# Altium PCB 2018_ACT_EXPANDER_4PUMPS.PCBDOC
Units mm, origin at the board's own origin, x right, y up, seen from the top; angles counter-clockwise.
Board outline 72 x 58 mm, 4 copper layers (1-TOP, 2-SIGNAL, 3-GND, 4-BOTTOM); 118 components, 80 nets, 382 pads, 73 vias.
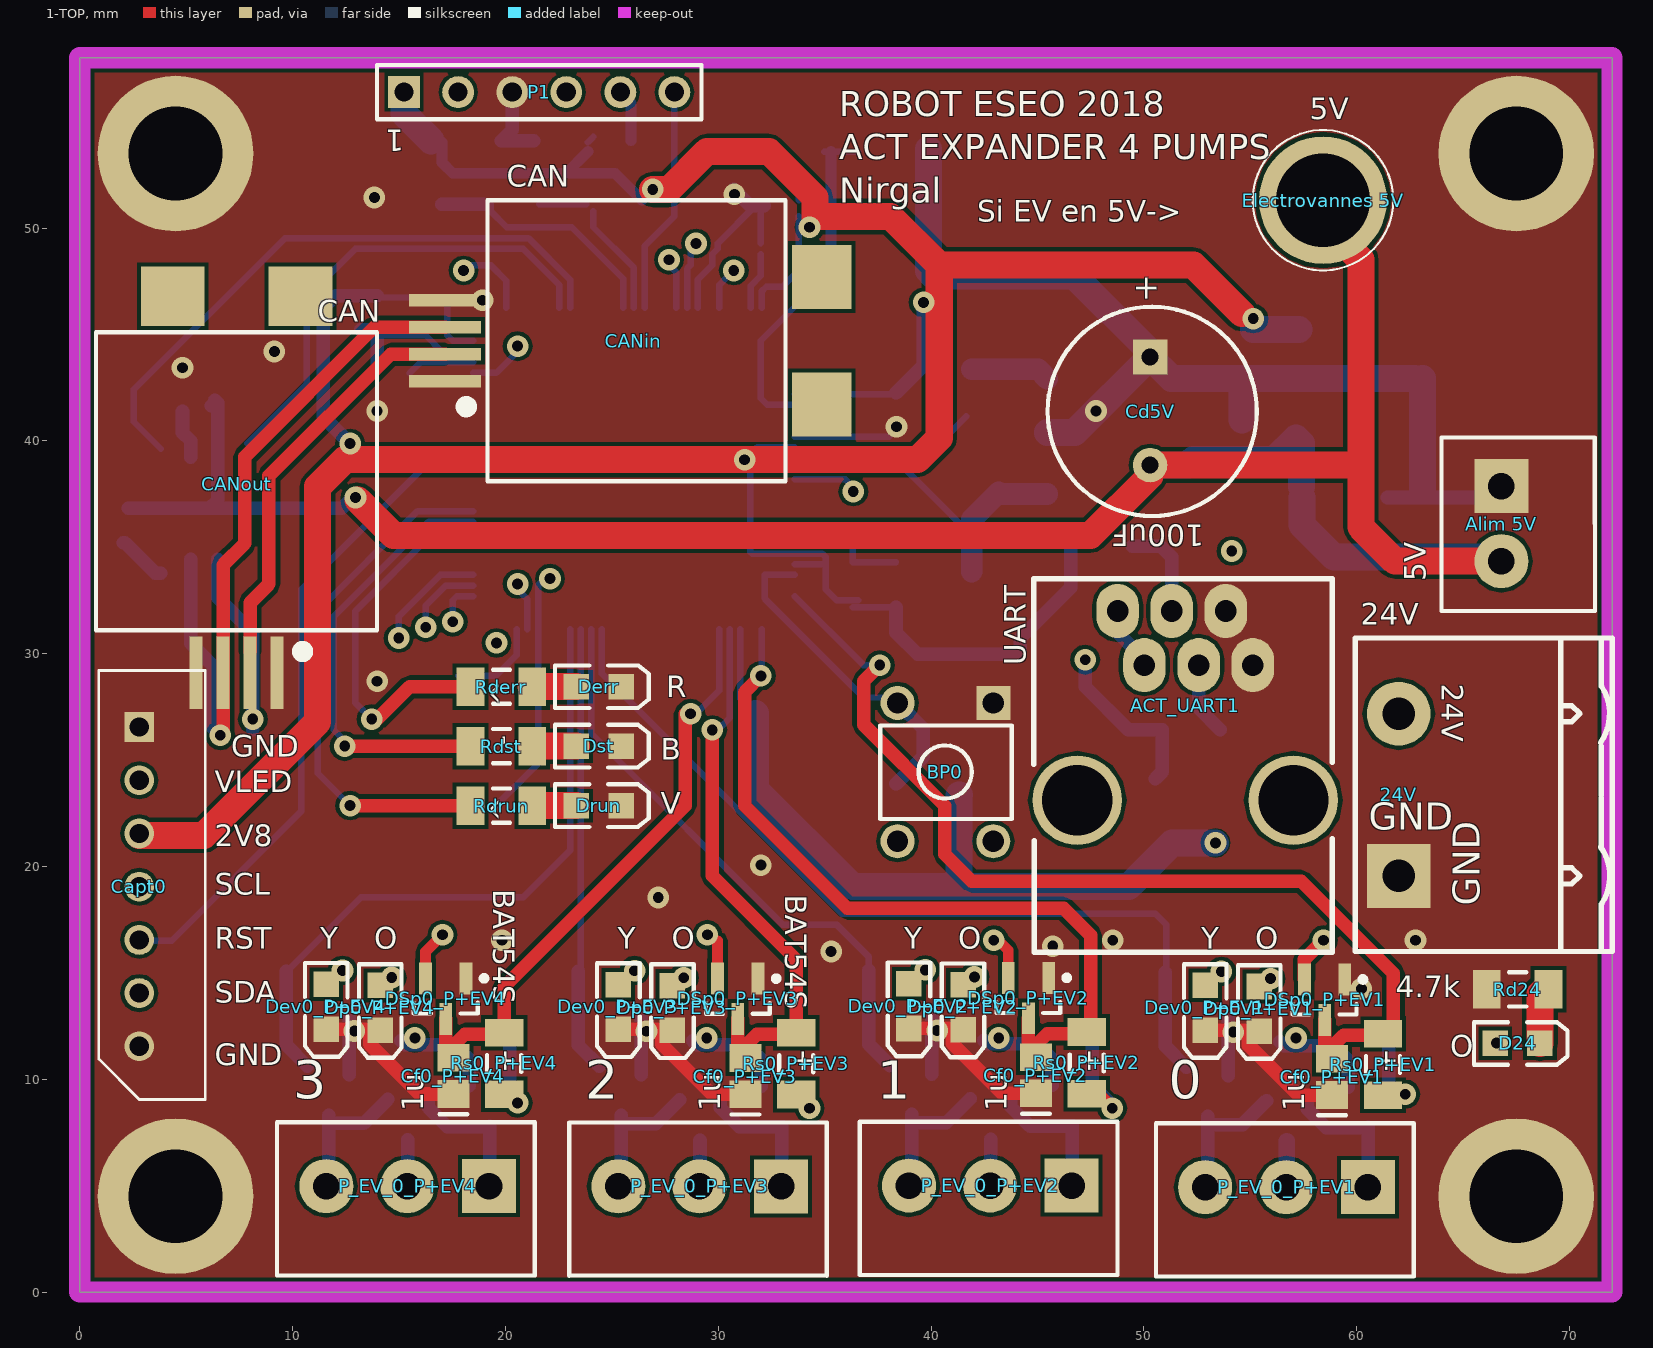
[diagram p0: 1-TOP view]
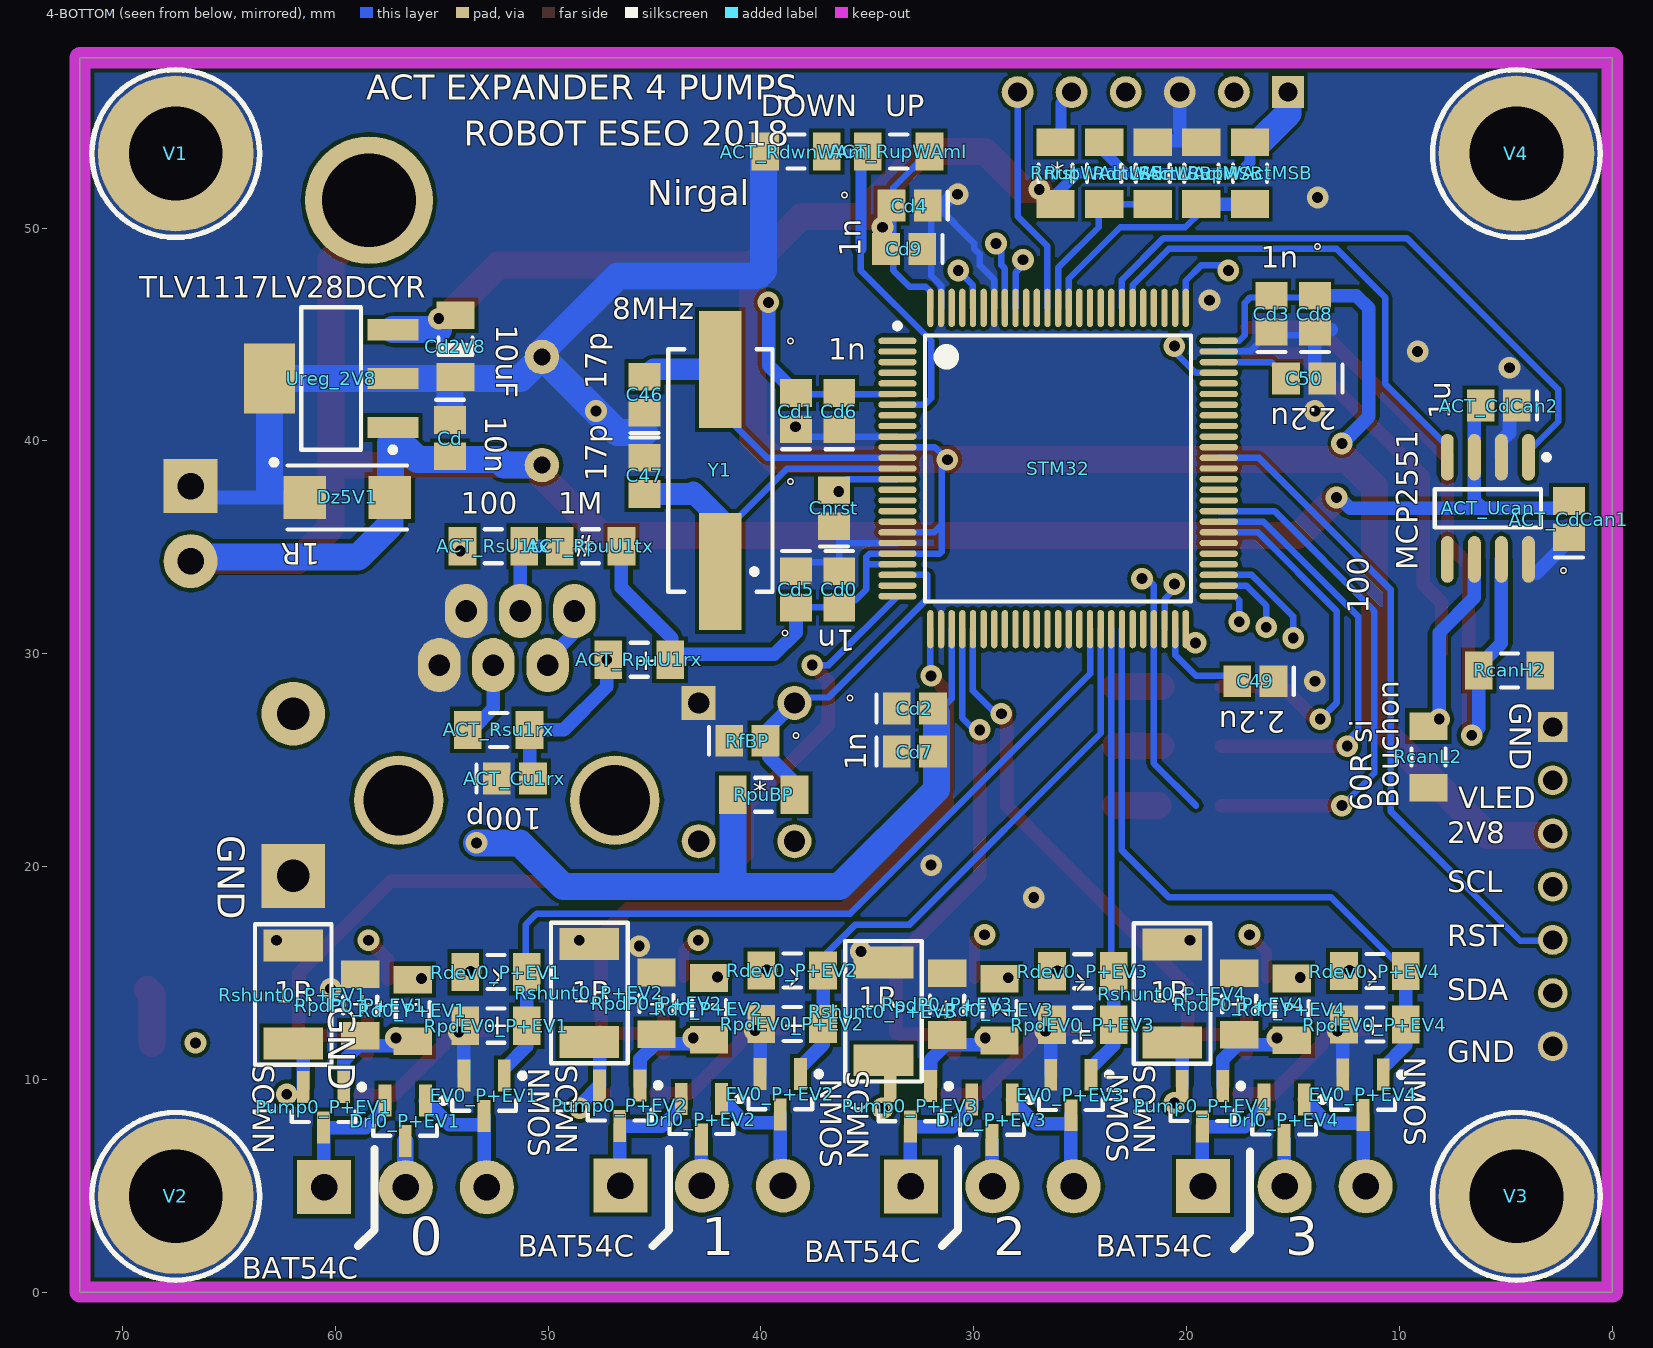
[diagram p1: 4-BOTTOM view, seen from below]
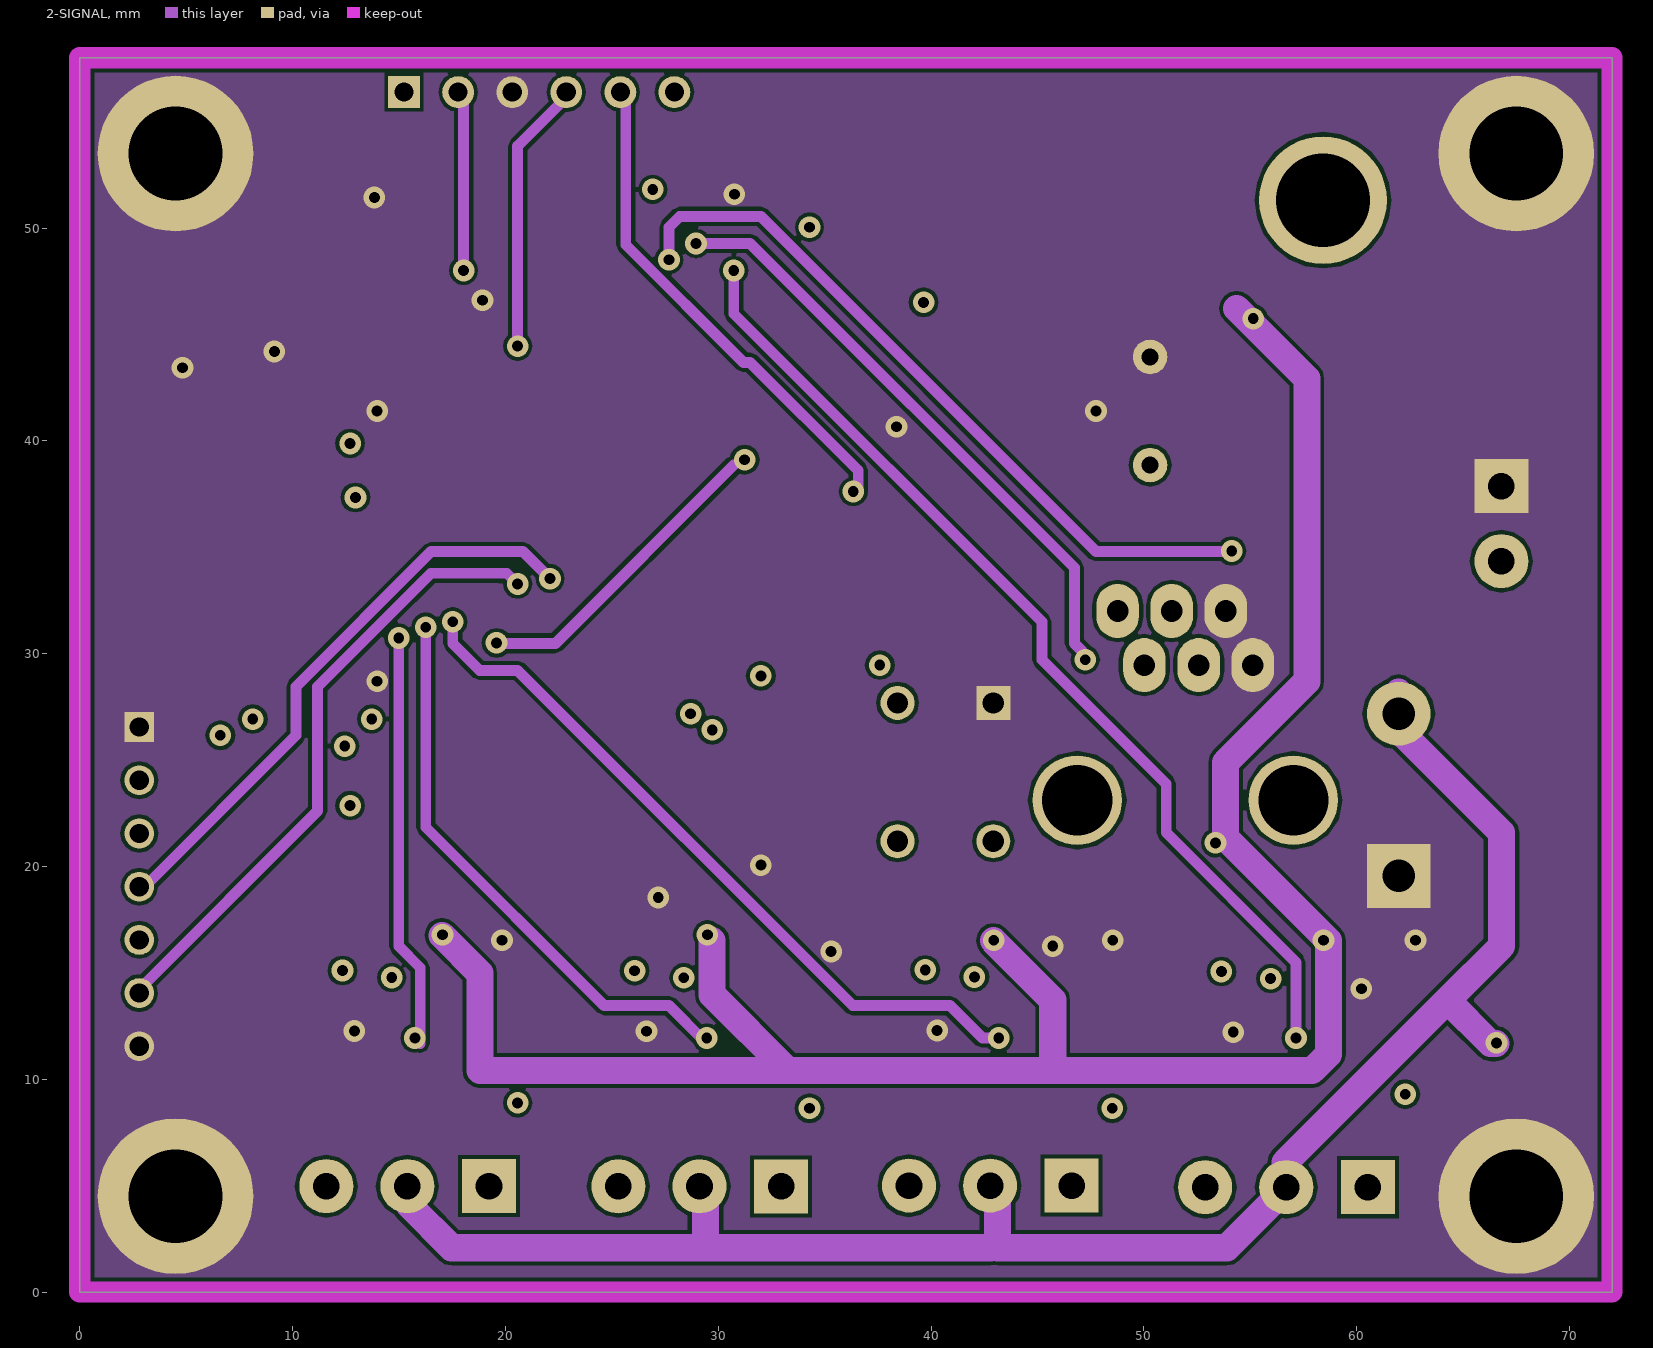
[diagram p2: 2-SIGNAL]
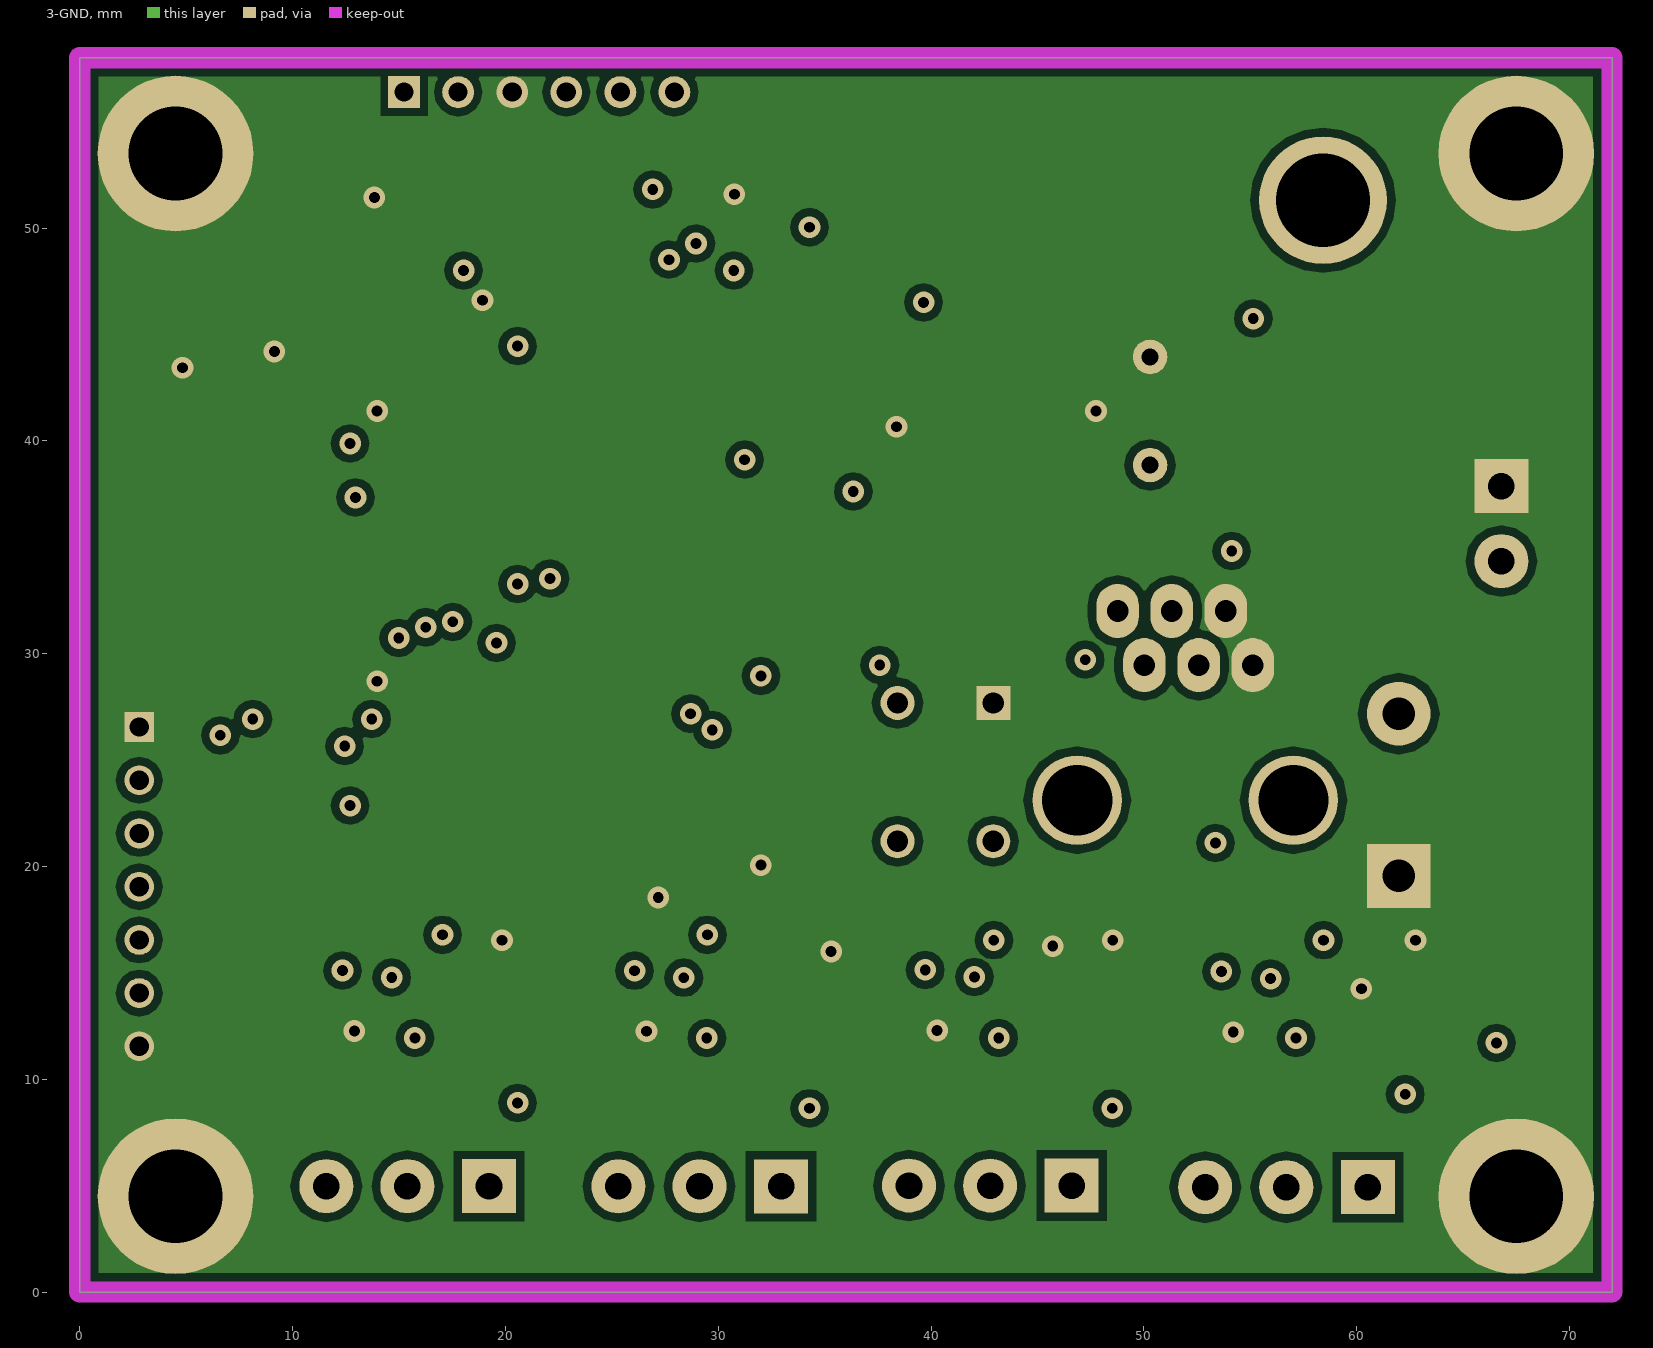
[diagram p3: 3-GND]
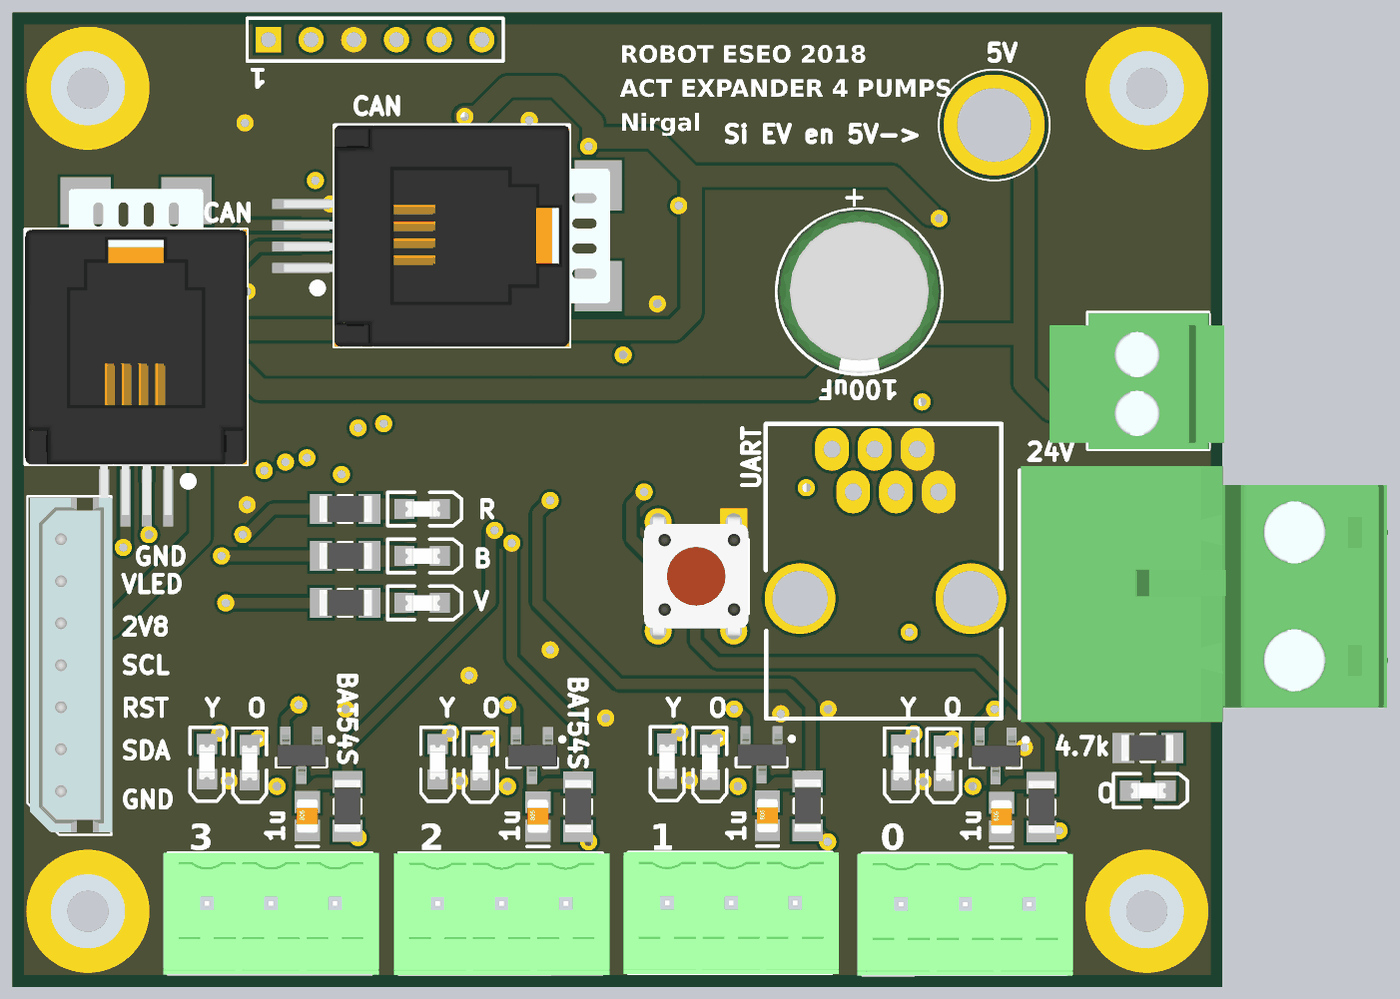
[diagram p4: 3D render of the assembled board from above, using the file's embedded part models]
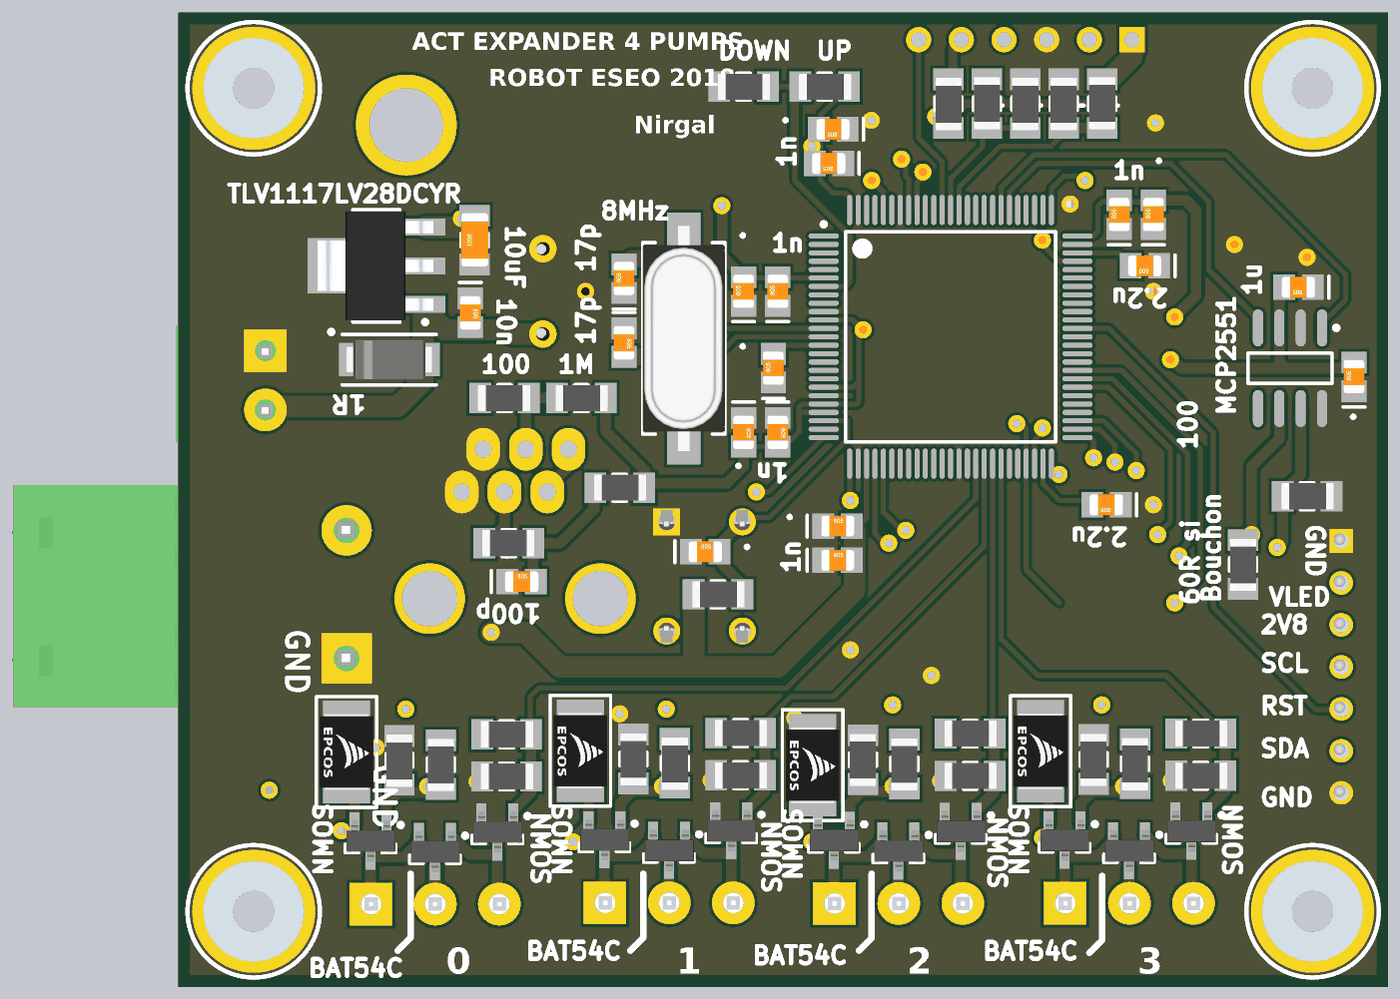
[diagram p5: 3D render of the assembled board from below, using the file's embedded part models]

## Layer stack, top to bottom
Top Solder: solder mask 0.0102, Solder Resist, Dk 3.5
1-TOP: signal copper 0.0356
Dielectric1: prepreg 0.32, FR-4, Dk 4.8
2-SIGNAL: signal copper 0.0356
Dielectric2: core 0.32, FR-4, Dk 4.8
3-GND: signal copper 0.0356
Dielectric3: prepreg 0.32, FR-4, Dk 4.8
4-BOTTOM: signal copper 0.0356
Bottom Solder: solder mask 0.0102, Solder Resist, Dk 3.5

## Board outline
0,0 0,58 72,58 72,0

## Design rules (kind name [scope] priority, off if disabled: settings)
Clearance Clearance_1 [InNamedPolygon('4-BOTTOM') Or  InNamedPolygon('2-SIGNAL') Or  InNamedPolygon('2-24V') Or  InNamedPolygon('3-TOP') Or  InNamedPolygon('3-GND')] p1: gap=0.381
Clearance [All] p2: gap=0.178
FabricationTestPointUsage TestPointUsage [All] p1: valid=0 allowmultiple=FALSE
FabricationTestpoint Testpoint [All] p1: side=3 testpointundercomponent=TRUE minsize=1.016 maxsize=2.54 preferedsize=1.524 minholesize=0 maxholesize=1.016 preferedholesize=0.813 testpointgrid=0.025 allowsidetop=TRUE allowsidebottom=TRUE usegrid=TRUE gridtolerance=0
PlaneClearance [All] p1: clearance=0.254
PlaneConnect [All] p1: planeconnectstyle=Direct reliefexpansion=0.635 reliefentries=4 reliefconductorwidth=0.305 reliefairgap=0.381
PolygonConnect [All] p1: connectstyle=Direct reliefconductorwidth=0.254 reliefentries=4 polygonreliefangle="90 Angle" airgapwidth=0.254
RoomDefinition P+EV1 [InComponentClass('P+EV1')] p1: confinementstyle=ConfineIn formatcopy=TRUE lockcomponents=FALSE outline 64.465,-0.584 64.465,18.567 49.428,18.567 49.428,-0.584
RoomDefinition P+EV2 [InComponentClass('P+EV2')] p2: confinementstyle=ConfineIn formatcopy=TRUE lockcomponents=FALSE outline 50.546,-0.508 50.546,18.644 35.509,18.644 35.509,-0.508
RoomDefinition P+EV4 [InComponentClass('P+EV4')] p3: confinementstyle=ConfineIn formatcopy=TRUE lockcomponents=FALSE outline 23.165,-0.536 23.165,18.616 8.128,18.616 8.128,-0.536
RoomDefinition 2018_ACT_EXPANDER [InComponentClass('2018_ACT_EXPANDER')] p4: confinementstyle=ConfineIn formatcopy=TRUE lockcomponents=FALSE outline 350.774,-27.432 387.604,-27.432 387.604,-40.894 350.774,-40.894
RoomDefinition P+EV3 [InComponentClass('P+EV3')] p5: confinementstyle=ConfineIn formatcopy=TRUE lockcomponents=FALSE outline 36.891,-0.544 36.891,18.608 21.854,18.608 21.854,-0.544
RoutingLayers RoutingLayers_1 [All] p1: top layer_v5=TRUE mid layer 1_v5=FALSE mid layer 2_v5=FALSE bottom layer_v5=TRUE
RoutingLayers [All] p2: top layer_v5=TRUE mid layer 1_v5=FALSE mid layer 2_v5=FALSE bottom layer_v5=TRUE
RoutingVias [All] p1: holewidth=0.711 width=1.27 viastyle="Through Hole" minholewidth=0.711 minwidth=1.27 maxholewidth=0.711 maxwidth=1.27
SilkToSolderMaskClearance SilkscreenOverComponentPads [IsPad] p1: minsilkscreentomaskgap=0.254 clearancetoexposedcopper=TRUE
SolderMaskExpansion [All] p1: expansion=0
Width [All] p1: maxlimit=7.62 minlimit=0.127 preferedwidth=0.508
23 further rules are at their usual default settings.

## Classes and differential pairs
component class 2018_ACT_EXPANDER: 24V ACT_CdCan1 ACT_CdCan2 ACT_Cu1rx ACT_RdwnWAmI ACT_RpuU1rx ACT_RpuU1tx ACT_Rsu1rx ACT_RsU1tx ACT_RupWAmI ACT_UART1 ACT_Ucan "Alim 5V" BP0 C46 C47 C49 C50 CANin CANout Capt0 Cd Cd0 Cd1 Cd2 Cd2V8 Cd3 Cd4 Cd5 Cd5V Cd6 Cd7 Cd8 Cd9 Cnrst D24 Derr Drun Dst Dz5V1 "Electrovannes 5V" P1 RcanH2 RcanL2 Rd24 Rderr RdnWActLSB RdnWActMSB Rdrun Rdst RfBP Rnrst RpuBP RupWActLSB RupWActMSB STM32 Ureg_2V8 V1 V2 V3 V4 Y1
channel class P+EV: P+EV1 P+EV2 P+EV3 P+EV4 P+EV5 P+EV6
component class P+EV4: Cf0_P+EV4 Dev0_P+EV4 Dp0_P+EV4 Drl0_P+EV4 DSp0_P+EV4 EV0_P+EV4 P_EV_0_P+EV4 Pump0_P+EV4 Rd0_P+EV4 Rdev0_P+EV4 RpdEV0_P+EV4 RpdP0_P+EV4 Rs0_P+EV4 Rshunt0_P+EV4
component class P+EV3: Cf0_P+EV3 Dev0_P+EV3 Dp0_P+EV3 Drl0_P+EV3 DSp0_P+EV3 EV0_P+EV3 P_EV_0_P+EV3 Pump0_P+EV3 Rd0_P+EV3 Rdev0_P+EV3 RpdEV0_P+EV3 RpdP0_P+EV3 Rs0_P+EV3 Rshunt0_P+EV3
component class P+EV2: Cf0_P+EV2 Dev0_P+EV2 Dp0_P+EV2 Drl0_P+EV2 DSp0_P+EV2 EV0_P+EV2 P_EV_0_P+EV2 Pump0_P+EV2 Rd0_P+EV2 Rdev0_P+EV2 RpdEV0_P+EV2 RpdP0_P+EV2 Rs0_P+EV2 Rshunt0_P+EV2
component class P+EV1: Cf0_P+EV1 Dev0_P+EV1 Dp0_P+EV1 Drl0_P+EV1 DSp0_P+EV1 EV0_P+EV1 P_EV_0_P+EV1 Pump0_P+EV1 Rd0_P+EV1 Rdev0_P+EV1 RpdEV0_P+EV1 RpdP0_P+EV1 Rs0_P+EV1 Rshunt0_P+EV1
net class EV[1..4]: EV1 EV2 EV3 EV4 EV5 EV6
net class PUMP[1..4]: PUMP1 PUMP2 PUMP3 PUMP4 PUMP5 PUMP6
net class SHUNT[1..4]: SHUNT1 SHUNT2 SHUNT3 SHUNT4 SHUNT5 SHUNT6

## Components (designator, comment, footprint, x,y, rotation, side; value= is the part's Value field where it differs from the comment)
24V "0 - 24V" BORNIER2_FEM_COUDE 61.976,19.558 r90 top
ACT_CdCan1 "100nF" C0805_N 2.032,36.322 r90 bottom
ACT_CdCan2 "1µF" C0805_N 5.334,41.656 r0 bottom
ACT_Cu1rx "100pF" C0805_N 51.562,24.13 r180 bottom
ACT_RdwnWAmI "0" R1206_N 38.354,53.594 r180 bottom
ACT_RpuU1rx "10k" R1206_N 45.72,29.718 r180 bottom
ACT_RpuU1tx "1M" R1206_N 48.006,35.052 r180 bottom
ACT_Rsu1rx "1k" R1206_N 52.324,26.416 r0 bottom
ACT_RsU1tx "100" R1206_N 52.578,35.052 r0 bottom
ACT_RupWAmI "0" R1206_N 33.528,53.594 r180 bottom
ACT_UART1 "RJ11_6/6" "RJ11_6/6 - droit" 53.848,32.004 r270 top
ACT_Ucan "MCP2551-I/SN" SO8_N 5.842,36.83 r270 bottom
"Alim 5V" "BORNIER_2V_3.5MM" BORNIER_2V_3.5MM 66.802,37.846 r270 top
BP0 "SW_Pushbutton_6x6mm_Vertical" "Switch 6x6 Vertical" 42.926,27.686 r270 top
C46 "17pF" C0805_N 45.466,42.164 r90 bottom
C47 "17pF" C0805_N 45.466,38.354 r270 bottom
C49 "2.2uF" C0805_N 16.764,28.702 r0 bottom
C50 "2.2uF" C0805_N 14.478,42.926 r0 bottom
CANin "634104149621" 634104149621 26.162,44.704 r90 top
CANout "634104149621" 634104149621 7.366,38.1 r180 top
Capt0 "BARRETTE7" MOLEX7_2.50MM 2.794,19.05 r90 top
Cd "10nF" C0805_N 54.61,40.132 r270 bottom
Cd0 "100nF" C0805_N 36.322,33.02 r270 bottom
Cd1 "100nF" C0805_N 38.354,41.402 r90 bottom
Cd2 "100nF" C0805_N 32.766,27.432 r180 bottom
Cd2V8 "4.7u" C1206_N 54.356,44.45 r90 bottom
Cd3 "100nF" C0805_N 16.002,45.974 r90 bottom
Cd4 "100nF" C0805_N 33.02,51.054 r0 bottom
Cd5 "1nF" C0805_N 38.354,33.02 r270 bottom
Cd5V "100uF" CONDENSATEUR_POLARISE_ELECTROLYTIQUE_RADIAL_5.08/8.9 50.292,43.942 r270 top
Cd6 "1nF" C0805_N 36.322,41.402 r90 bottom
Cd7 "1nF" C0805_N 32.766,25.4 r180 bottom
Cd8 "1nF" C0805_N 13.97,45.974 r90 bottom
Cd9 "1nF" C0805_N 33.274,49.022 r0 bottom
Cf0_P+EV1 "1uF" C0805_N 58.852,10.109 r90 top (schematic designator Cf0)
Cf0_P+EV2 "1uF" C0805_N 44.933,10.185 r90 top (schematic designator Cf0)
Cf0_P+EV3 "1uF" C0805_N 31.278,10.15 r90 top (schematic designator Cf0)
Cf0_P+EV4 "1uF" C0805_N 17.551,10.158 r90 top (schematic designator Cf0)
Cnrst "100nF" C0805_N 36.576,36.83 r90 bottom
D24 "LED Orange" LED_0805 67.564,11.684 r0 top
Derr "LED Rouge" LED_0805 24.384,28.448 r0 top
Dev0_P+EV1 "jaune" LED_0805 52.883,13.36 r270 top (schematic designator Dev0)
Dev0_P+EV2 "jaune" LED_0805 38.964,13.437 r270 top (schematic designator Dev0)
Dev0_P+EV3 "jaune" LED_0805 25.309,13.401 r270 top (schematic designator Dev0)
Dev0_P+EV4 "jaune" LED_0805 11.582,13.409 r270 top (schematic designator Dev0)
Dp0_P+EV1 "orange" LED_0805 55.423,13.31 r270 top (schematic designator Dp0)
Dp0_P+EV2 "orange" LED_0805 41.504,13.386 r270 top (schematic designator Dp0)
Dp0_P+EV3 "orange" LED_0805 27.849,13.35 r270 top (schematic designator Dp0)
Dp0_P+EV4 "orange" LED_0805 14.122,13.358 r270 top (schematic designator Dp0)
Drl0_P+EV1 "BAT54C" SOT23-3N 56.718,8.052 r270 bottom (schematic designator Drl0)
Drl0_P+EV2 "BAT54C" SOT23-3N 42.799,8.128 r270 bottom (schematic designator Drl0)
Drl0_P+EV3 "BAT54C" SOT23-3N 29.144,8.092 r270 bottom (schematic designator Drl0)
Drl0_P+EV4 "BAT54C" SOT23-3N 15.418,8.1 r270 bottom (schematic designator Drl0)
Drun "LED verte" LED_0805 24.384,22.86 r0 top
DSp0_P+EV1 "BAT54S" SOT23-3N 58.496,13.741 r270 top (schematic designator DSp0)
DSp0_P+EV2 "BAT54S" SOT23-3N 44.577,13.818 r270 top (schematic designator DSp0)
DSp0_P+EV3 "BAT54S" SOT23-3N 30.922,13.782 r270 top (schematic designator DSp0)
DSp0_P+EV4 "BAT54S" SOT23-3N 17.196,13.79 r270 top (schematic designator DSp0)
Dst "LED Bleu" LED_0805 24.384,25.654 r0 top
Dz5V1 "Diode Zener" "SMA Diode" 59.436,37.338 r180 bottom
"Electrovannes 5V" "Name" "Point Test_D0.9_P0.5mm" 58.42,51.308 r90 top
EV0_P+EV1 "MOSN" SOT23-3N 53.01,9.22 r270 bottom (schematic designator EV0)
EV0_P+EV2 "MOSN" SOT23-3N 39.091,9.296 r270 bottom (schematic designator EV0)
EV0_P+EV3 "MOSN" SOT23-3N 25.436,9.261 r270 bottom (schematic designator EV0)
EV0_P+EV4 "MOSN" SOT23-3N 11.709,9.269 r270 bottom (schematic designator EV0)
P1 "ProgSWD" HDR1X6 15.24,56.388 r0 top
P_EV_0_P+EV1 "BORNIER_3V_3.81MM" BORNIER_3V_3.81MM 60.503,4.928 r180 top (schematic designator P_EV_0)
P_EV_0_P+EV2 "BORNIER_3V_3.81MM" BORNIER_3V_3.81MM 46.584,5.004 r180 top (schematic designator P_EV_0)
P_EV_0_P+EV3 "BORNIER_3V_3.81MM" BORNIER_3V_3.81MM 32.929,4.968 r180 top (schematic designator P_EV_0)
P_EV_0_P+EV4 "BORNIER_3V_3.81MM" BORNIER_3V_3.81MM 19.202,4.976 r180 top (schematic designator P_EV_0)
Pump0_P+EV1 "MOSN" SOT23-3N 60.554,8.687 r270 bottom (schematic designator Pump0)
Pump0_P+EV2 "MOSN" SOT23-3N 46.634,8.763 r270 bottom (schematic designator Pump0)
Pump0_P+EV3 "MOSN" SOT23-3N 32.979,8.727 r270 bottom (schematic designator Pump0)
Pump0_P+EV4 "MOSN" SOT23-3N 19.253,8.735 r270 bottom (schematic designator Pump0)
RcanH2 "60" R1206_N 4.826,29.21 r180 bottom
RcanL2 "60" R1206_N 8.636,25.146 r270 bottom
Rd0_P+EV1 "150" R1206_N 56.363,13.233 r270 bottom (schematic designator Rd0)
Rd0_P+EV2 "150" R1206_N 42.443,13.31 r270 bottom (schematic designator Rd0)
Rd0_P+EV3 "150" R1206_N 28.788,13.274 r270 bottom (schematic designator Rd0)
Rd0_P+EV4 "150" R1206_N 15.062,13.282 r270 bottom (schematic designator Rd0)
Rd24 "4.7k" R1206_N 67.564,14.224 r180 top
Rderr "150" R1206_N 19.812,28.448 r0 top
Rdev0_P+EV1 "150" R1206_N 52.451,15.037 r180 bottom (schematic designator Rdev0)
Rdev0_P+EV2 "150" R1206_N 38.532,15.113 r180 bottom (schematic designator Rdev0)
Rdev0_P+EV3 "150" R1206_N 24.877,15.077 r180 bottom (schematic designator Rdev0)
Rdev0_P+EV4 "150" R1206_N 11.151,15.085 r180 bottom (schematic designator Rdev0)
RdnWActLSB "100" R1206_N 21.59,52.578 r270 bottom
RdnWActMSB "100" R1206_N 19.304,52.578 r270 bottom
Rdrun "150" R1206_N 19.812,22.86 r0 top
Rdst "100" R1206_N 19.812,25.654 r0 top
RfBP "100nF" C0805_N 40.64,25.908 r180 bottom
Rnrst "100k" R1206_N 26.162,52.578 r270 bottom
RpdEV0_P+EV1 "10K" R1206_N 52.451,12.522 r180 bottom (schematic designator RpdEV0)
RpdEV0_P+EV2 "10K" R1206_N 38.532,12.598 r180 bottom (schematic designator RpdEV0)
RpdEV0_P+EV3 "10K" R1206_N 24.877,12.563 r180 bottom (schematic designator RpdEV0)
RpdEV0_P+EV4 "10K" R1206_N 11.151,12.571 r180 bottom (schematic designator RpdEV0)
RpdP0_P+EV1 "10K" R1206_N 58.826,13.487 r270 bottom (schematic designator RpdP0)
RpdP0_P+EV2 "10K" R1206_N 44.907,13.564 r270 bottom (schematic designator RpdP0)
RpdP0_P+EV3 "10K" R1206_N 31.252,13.528 r270 bottom (schematic designator RpdP0)
RpdP0_P+EV4 "10K" R1206_N 17.526,13.536 r270 bottom (schematic designator RpdP0)
RpuBP "100k" R1206_N 39.878,23.368 r180 bottom
Rs0_P+EV1 "10K" R1206_N 61.239,10.693 r90 top (schematic designator Rs0)
Rs0_P+EV2 "10K" R1206_N 47.32,10.77 r90 top (schematic designator Rs0)
Rs0_P+EV3 "10K" R1206_N 33.665,10.734 r90 top (schematic designator Rs0)
Rs0_P+EV4 "10K" R1206_N 19.939,10.742 r90 top (schematic designator Rs0)
Rshunt0_P+EV1 "1 / 1w" INDUCTANCE_CMS_1812 62.281,16.281 r270 bottom (schematic designator Rshunt0)
Rshunt0_P+EV2 "1 / 1w" INDUCTANCE_CMS_1812 48.362,16.358 r270 bottom (schematic designator Rshunt0)
Rshunt0_P+EV3 "1 / 1w" INDUCTANCE_CMS_1812 34.544,15.494 r270 bottom (schematic designator Rshunt0)
Rshunt0_P+EV4 "1 / 1w" INDUCTANCE_CMS_1812 20.98,16.33 r270 bottom (schematic designator Rshunt0)
RupWActLSB "100" R1206_N 23.876,52.578 r90 bottom
RupWActMSB "100" R1206_N 17.018,52.578 r90 bottom
STM32 "STM32F407VGT6" STM-LQFP100_N 26.037,38.699 r180 bottom locked
Ureg_2V8 "TLV1117LV28DCYR" SOT223-4N 60.198,42.926 r0 bottom
V1 "Entretoise WURTH CMS" ENTRETOISE_CMS 67.5,53.5 r180 bottom
V2 "Entretoise WURTH CMS" ENTRETOISE_CMS 67.5,4.5 r180 bottom
V3 "Entretoise WURTH CMS" ENTRETOISE_CMS 4.5,4.5 r180 bottom
V4 "Entretoise WURTH CMS" ENTRETOISE_CMS 4.5,53.5 r180 bottom
Y1 "8 MHz" HC49/4H_SMX 41.91,38.608 r90 bottom

## Footprints (in the part's own frame and the unit in brackets; to place one, negate y for a bottom-side part, rotate by r counter-clockwise, add the part's x,y. Pads: shape width x height; smd on the part's side, far side on the other; paste and mask are expansions set on the pad)
634104149621 [mm] "Modular Jack SMT Vertical Plastic 4P4C Top Entry"
  rect 0.6x3.4 smd: 1(-1.905,9) 2(-0.635,9) 3(0.635,9) 4(1.905,9)
  rect 3x2.8 smd: MH1(-3,-8.7) MH2(3,-8.7)
  silkscreen extent -6.6,-7 6.6,8.25, body extent -6.6,-9.4 6.6,10, height 13
BORNIER2_FEM_COUDE [mm] "Connector; Header; 2 Position; Right Angle; Female; Pin Spacing=5.08mm Green"
  rect 3x3 hole 1.524: 1(0,0)
  round 3 hole 1.524: 2(7.62,0)
  silkscreen extent -3.56,-10.03 11.18,2.03, body extent -3.78,-19.88 11.46,1.96, height 15.2
BORNIER_2V_3.5MM [mm]
  rect 2.54x2.54 hole 1.25: 1(-0.025,0)
  round 2.54 hole 1.25: 2(3.5,0)
  silkscreen extent -2.31,-2.82 5.84,4.39, body extent -2.27,-5.08 5.83,5.32, height 21.81
BORNIER_3V_3.81MM [mm]
  rect 2.54x2.54 hole 1.25: 1(-0.025,0)
  round 2.54 hole 1.25: 2(3.81,0) 3(7.62,0)
  silkscreen extent -2.18,-3 9.93,4.2, body extent -2.6,-3 10.22,4.25, height 9.22
C0805_N [mm] "Chip Capacitor, Body 2.0x1.3mm, IPC Medium Density"
  rect 1.3x1.5 smd: 1(-0.85,0) 2(0.85,0)
  silkscreen extent -1.8,-0.65 -1.8,0.65, body extent -0.99,-0.63 1.01,0.63, height 0.8
C1206_N [mm] "Chip Capacitor, Body 3.2x1.6mm, IPC Medium Density"
  rect 1.3x1.8 smd: 1(-1.45,0) 2(1.45,0)
  silkscreen extent -0.4,-0.8 0.4,0.8, body extent -1.57,-0.81 1.63,0.79, height 1.02
CONDENSATEUR_POLARISE_ELECTROLYTIQUE_RADIAL_5.08/8.9 [mil] "CONDENSATEUR_POLARISE_ELECTROLYTIQUE_RADIAL ; DIAMETRE : 8.9mm ; ESPACEMENT BROCHES : 5.08mm"
  rect 64x64 / inner round 64 / far side round 64 hole 32: 1(0,0)
  round 64 hole 32: 2(200,0)
  silkscreen extent -93,-190 294,197, body extent -93,-188 291,196, height 485
ENTRETOISE_CMS [mil] "Entretoise CMS Wurth trou 4.4mm"
  round 288 hole 173.23: 1(0,0)
  silkscreen extent -155,-155 155,155, body extent -118,-118 118,117, height 118
HC49/4H_SMX [mm] "Quartz Crystal, SM; Body 13.4 (inc. leads) x 4.9 mm (LxW max)"
  rect 5.5x2 smd: 1(-4.75,0) 2(4.75,0)
  silkscreen extent -5.7,-2.45 5.7,2.45, body extent -6.7,-2.45 6.7,2.45, height 5.08
HDR1X6 [mm] "Connector; Header; 6 Position"
  rect 1.5x1.5 hole 0.9: 1(0,0)
  round 1.5 hole 0.9: 2(2.54,0) 3(5.08,0) 4(7.62,0) 5(10.16,0) 6(12.7,0)
  silkscreen extent -1.27,-1.27 13.97,1.27
INDUCTANCE_CMS_1812 [mm] "INDUCTANCE CMS 1812 ; DIMENSIONS : 4.5mm x 3.2mm"
  rect 1.5x2.8 smd: 1(0,0.3) 2(4.6,0.3)
  silkscreen extent -1,-1.5 5.6,2.1, body extent 0.05,-1.3 4.55,1.9, height 3.24
LED_0805 [mm] "SM LED; 2 Flat Leads"
  rect 1.2x1.2 smd: 1(-1.05,0) 2(1.05,0)
  silkscreen extent -2.05,-1 2.35,1, body extent -1.05,-0.64 1.06,0.64, height 1.2
MOLEX7_2.50MM [mm] "7 pins, straight"
  rect 1.4x1.4 hole 0.9: 1(7.5,0)
  round 1.4 hole 0.9: 2(5,0) 3(2.5,0) 4(0,0) 5(-2.5,0) 6(-5,0) 7(-7.5,0)
  silkscreen extent -10,-3.1 10.16,1.9, body extent -9.85,-3.15 10.05,1.75, height 5.95
"Point Test_D0.9_P0.5mm" [mm] "Test point for PCB_Hole 0.5mm"
  round 6 hole 4.4: 1(0,0)
  silkscreen extent -3.3,-3.3 3.3,3.3
R1206_N [mm] "Chip Resistor, Body 3.2x1.6mm, IPC Medium Density"
  rect 1.3x1.8 smd: 1(-1.45,0) 2(1.45,0)
  silkscreen extent -0.4,-0.8 0.4,0.8, body extent -1.68,-0.87 1.68,0.87, height 0.71
"RJ11_6/6 - droit" [mm] "Connector; RJ11; 6P/6C; Low Profil; Right Angle; Pin Spacing=2.54mm"
  oval 2.54x2 hole 1.016: 1(0,-5.08) 2(2.54,-3.82) 3(0,-2.54) 4(2.54,-1.27) 5(0,0) 6(2.54,1.27)
  round 4.2 hole 3.302: FIX1(8.89,3.18) FIX2(8.89,-6.98)
  silkscreen extent -1.51,-9.02 16.03,5, body extent -1.17,-9.66 15.31,6, height 16.45
"SMA Diode" [mm] "Case 403D-02"
  rect 2x2 smd: 1(-2,0) 2(2,0)
  silkscreen extent -3.58,-1.5 2.8,1.77, body extent -2.8,-1.46 2.79,1.46, height 2.41
SO8_N [mm] "SOIC, 8-Leads, Body 4.9x3.9mm, Pitch 1.27mm, IPC Medium Density"
  oval 2.2x0.6 smd: 1(-2.4,1.905) 2(-2.4,0.635) 3(-2.4,-0.635) 4(-2.4,-1.905) 5(2.4,-1.905) 6(2.4,-0.635) 7(2.4,0.635) 8(2.4,1.905)
  silkscreen extent -2.52,-2.5 0.9,2.88, body extent -2,-2.5 2,2.5, height 1.75
SOT23-3N [mm] "SOT23, 3-Leads, Body 2.9x1.3mm, Pitch 0.95mm, Lead Span 2.5mm, IPC Medium Density"
  rect 1.5x0.6 smd: 1(-0.95,0.95) 2(-0.95,-0.95) 3(0.95,0)
  silkscreen extent -1.07,-1.5 0.7,1.92, body extent -1.24,-1.5 1.23,1.5, height 1.1
SOT223-4N [mm] "SOT223/SC73, 4-Leads, Body 6.5x3.5mm, Pitch 2.3mm, Lead Span 7mm, IPC Medium Density"
  rect 2.4x1 smd: 1(-2.9,2.3) 2(-2.9,0) 3(-2.9,-2.3)
  rect 2.4x3.3 smd: 4(2.9,0)
  silkscreen extent -3.02,-3.35 1.4,3.47, body extent -3.39,-3.35 3.5,3.35, height 1.8
STM-LQFP100_N [mm] "Thin QFP, 100-Leads, Body 14x14mm, Pitch 0.5mm, IPC Medium Density"
  oval 1.8x0.3 smd: 1(-7.55,6) 2(-7.55,5.5) 3(-7.55,5) 4(-7.55,4.5) 5(-7.55,4) 6(-7.55,3.5) 7(-7.55,3) 8(-7.55,2.5) 9(-7.55,2) 10(-7.55,1.5) 11(-7.55,1) 12(-7.55,0.5) 13(-7.55,0) 14(-7.55,-0.5) 15(-7.55,-1) 16(-7.55,-1.5) 17(-7.55,-2) 18(-7.55,-2.5) 19(-7.55,-3) 20(-7.55,-3.5) 21(-7.55,-4) 22(-7.55,-4.5) 23(-7.55,-5) 24(-7.55,-5.5) 25(-7.55,-6) 51(7.55,-6) 52(7.55,-5.5) 53(7.55,-5) 54(7.55,-4.5) 55(7.55,-4) 56(7.55,-3.5) 57(7.55,-3) 58(7.55,-2.5) 59(7.55,-2) 60(7.55,-1.5) 61(7.55,-1) 62(7.55,-0.5) 63(7.55,0) 64(7.55,0.5) 65(7.55,1) 66(7.55,1.5) 67(7.55,2) 68(7.55,2.5) 69(7.55,3) 70(7.55,3.5) 71(7.55,4) 72(7.55,4.5) 73(7.55,5) 74(7.55,5.5) 75(7.55,6)
  oval 0.3x1.8 smd: 26(-6,-7.55) 27(-5.5,-7.55) 28(-5,-7.55) 29(-4.5,-7.55) 30(-4,-7.55) 31(-3.5,-7.55) 32(-3,-7.55) 33(-2.5,-7.55) 34(-2,-7.55) 35(-1.5,-7.55) 36(-1,-7.55) 37(-0.5,-7.55) 38(0,-7.55) 39(0.5,-7.55) 40(1,-7.55) 41(1.5,-7.55) 42(2,-7.55) 43(2.5,-7.55) 44(3,-7.55) 45(3.5,-7.55) 46(4,-7.55) 47(4.5,-7.55) 48(5,-7.55) 49(5.5,-7.55) 50(6,-7.55) 76(6,7.55) 77(5.5,7.55) 78(5,7.55) 79(4.5,7.55) 80(4,7.55) 81(3.5,7.55) 82(3,7.55) 83(2.5,7.55) 84(2,7.55) 85(1.5,7.55) 86(1,7.55) 87(0.5,7.55) 88(0,7.55) 89(-0.5,7.55) 90(-1,7.55) 91(-1.5,7.55) 92(-2,7.55) 93(-2.5,7.55) 94(-3,7.55) 95(-3.5,7.55) 96(-4,7.55) 97(-4.5,7.55) 98(-5,7.55) 99(-5.5,7.55) 100(-6,7.55)
  silkscreen extent -7.68,-6.25 6.25,6.82, body extent -7,-7 7,7, height 1.6
"Switch 6x6 Vertical" [mm]
  rect 1.6x1.6 hole 1: 1(0,0)
  round 1.6 hole 1: 2(6.5,0) 3(0,-4.5) 4(6.5,-4.5)
  silkscreen extent 1.07,-5.31 5.46,0.86, body extent -0.71,-5.34 7.19,0.86, height 7

## Part data
24V: library part BORNIER2, "Terminal blocks, 2 pins, pitch=5mm"
ACT_CdCan1 ACT_CdCan2 ACT_Cu1rx C46 C47 C49 C50 Cd Cd0 Cd1 Cd2 Cd3 Cd4 Cd5 Cd6 Cd7 Cd8 Cd9 Cf0_P+EV1 Cf0_P+EV2 Cf0_P+EV3 Cf0_P+EV4 Cnrst RfBP: library part Condensateur, "Capacitor"
ACT_RdwnWAmI ACT_RpuU1rx ACT_RpuU1tx ACT_Rsu1rx ACT_RsU1tx ACT_RupWAmI RcanH2 RcanL2 Rd0_P+EV1 Rd0_P+EV2 Rd0_P+EV3 Rd0_P+EV4 Rd24 Rderr Rdev0_P+EV1 Rdev0_P+EV2 Rdev0_P+EV3 Rdev0_P+EV4 RdnWActLSB RdnWActMSB Rdrun Rdst Rnrst RpdEV0_P+EV1 RpdEV0_P+EV2 RpdEV0_P+EV3 RpdEV0_P+EV4 RpdP0_P+EV1 RpdP0_P+EV2 RpdP0_P+EV3 RpdP0_P+EV4 RpuBP Rs0_P+EV1 Rs0_P+EV2 Rs0_P+EV3 Rs0_P+EV4 Rshunt0_P+EV1 Rshunt0_P+EV2 Rshunt0_P+EV3 Rshunt0_P+EV4 RupWActLSB RupWActMSB: library part Resistor, "Resistor"
ACT_UART1: "Right Angle, Standard Profile, Offset Latch DECconnect, Flangeless PCB Jack"
ACT_Ucan: "High-Speed CAN Transceiver, 8-Pin SOIC, Industrial Temperature"
BP0: "Switch tactil 6mm x 6mm Vertical"
CANin CANout: "Modular Jack SMT Vertical Plastic 4P4C Top Entry WR-MJ"
Capt0: "Header, 6-Pin"
Cd2V8: library part Capacitor, "Capacitor"
Cd5V: library part "Condensateur Polarise Traversant", "Polarized Capacitor"
D24 Derr Dev0_P+EV1 Dev0_P+EV2 Dev0_P+EV3 Dev0_P+EV4 Dp0_P+EV1 Dp0_P+EV2 Dp0_P+EV3 Dp0_P+EV4 Drun Dst: library part LED, "Typical LED"
Drl0_P+EV1 Drl0_P+EV2 Drl0_P+EV3 Drl0_P+EV4: library part "Diode Shottky double BAT54C", "DIODE SCHOTTKY DOUBLE"
DSp0_P+EV1 DSp0_P+EV2 DSp0_P+EV3 DSp0_P+EV4: library part "Diode Shottky double BAT54S", "DIODE SCHOTTKY DOUBLE"
Dz5V1: "Zener Diode"
"Electrovannes 5V": library part "Point Test", "Point test"
EV0_P+EV1 EV0_P+EV2 EV0_P+EV3 EV0_P+EV4 Pump0_P+EV1 Pump0_P+EV2 Pump0_P+EV3 Pump0_P+EV4: library part "Transistor MOSFET-N", "N-Channel MOSFET"
P1: library part "Header 6", "Header, 6-Pin"
STM32: "ARM Cortex-M4 32-bit MCU+FPU, 210 DMIPS, 1024 kB Flash, 192 kB Internal RAM, 82 I/Os, 100-pin LQFP, -40 to 85 degC, Tray"
Ureg_2V8: library part MCP1826S-3302E/DB, "1000 mA, Low Voltage, Low Quiescent Current LDO Regulator, 3-Pin SOT-223, Extended Temperature"
V1 V2 V3 V4: "Entretoise Wurth"
Y1: library part Quartz, "Crystal Oscillator"

## Via types
v1: diameter 1.016, hole 0.508, 1-TOP to 4-BOTTOM, 73 vias

## Nets (pads, with @x,y where several pads share a name; then routed paths per layer and width w, separated by ;. In a path a pad name is that pad's centre, name@x,y a point inside that pad or via, vN(x,y) a via of type N, cw(c..) or ccw(c..) an arc to the next point about the centre after c; other vN are vias at no path point)
2V8: ACT_RpuU1rx.2 ACT_RpuU1tx.2 ACT_RupWAmI.2 Capt0.3 Cd0.2 Cd1.2 Cd2.2 Cd2V8.2 Cd3.2 Cd4.2 Cd5.2 Cd6.2 Cd7.2 Cd8.2 Cd9.2 DSp0_P+EV1.2 DSp0_P+EV2.2 DSp0_P+EV3.2 DSp0_P+EV4.2 P1.1 Rnrst.2 RpuBP.1 RupWActLSB.2 RupWActMSB.2 STM32.6 STM32.11 STM32.19 STM32.21 STM32.22 STM32.28 STM32.50 STM32.75 STM32.100 Ureg_2V8.3 | length 337.6
  1-TOP w0.508: DSp0_P+EV4.2 16.246,15.992 v1@17.018,16.764 ; DSp0_P+EV3.2 29.972,16.51 ; v1@43.18,16.51 43.627,16.063 DSp0_P+EV2.2
  1-TOP w0.635: DSp0_P+EV1.2 57.546,15.636 v1@58.42,16.51
  1-TOP w1.27: Capt0.3@2.794,21.463 5.842,21.463 11.176,26.797 11.176,37.846 12.446,39.116 v1(31.242,39.116) 39.37,39.116 40.386,40.132 40.386,48.26 ; v1(26.924,51.816) 27.686,51.816 29.464,53.594 32.385,53.594 34.544,51.435 34.544,50.546 38.1,50.546 40.386,48.26 ; 54.61,45.974 52.324,48.26 40.386,48.26
  2-SIGNAL w0.508: v1@19.558,30.48 22.352,30.48 30.734,38.862
  2-SIGNAL w1.27: v1@17.018,16.764 18.796,14.986 18.796,10.414 33.274,10.414 ; v1@29.718,16.51 29.718,13.97 33.274,10.414 ; v1@42.926,16.51 45.72,13.716 45.72,10.414 ; 54.356,46.228 57.658,42.926 57.658,28.702 53.848,24.892 53.848,21.336 58.674,16.51 58.674,11.176 57.912,10.414 45.72,10.414 ; 33.274,10.414 45.72,10.414
  4-BOTTOM w0.305: Cd8.2@14.224,46.736 17.018,46.736 17.272,46.482 17.272,44.958 17.531,44.699 STM32.75 ; RupWActLSB.2 RupWActLSB.2@24.13,54.282 ; STM32.28 31.037,27.891 Cd2.2@31.75,27.178 ; v1(31.242,39.116) 31.825,39.699 STM32.11 ; v1@31.496,39.116 31.496,36.068 ; ACT_RupWAmI.2@32.004,53.594 ACT_RupWAmI.2@32.258,53.848 ; STM32.100 32.037,47.023 32.258,47.244 33.02,47.244 33.782,48.006 Cd4.2@33.782,50.546 ; ACT_RupWAmI.2 33.782,51.89 Cd4.2@33.782,51.308 ; STM32.22 34.961,34.199 ; STM32.19 31.865,35.699 31.496,36.068 ; STM32.6 Cd1.2@38.319,42.199 ; Cd0.2 Cd5.2@38.266,32.17 ; Cd0.2@36.576,32.512 35.56,32.512 35.052,33.02 35.052,34.544 34.897,34.699 STM32.21 31.595,34.699 31.496,34.798 31.496,36.068
  4-BOTTOM w0.508: RupWActMSB.2 17.018,53.086 17.526,52.578 22.86,52.578 ; RupWActLSB.2@23.876,53.594 22.86,52.578 ; Rnrst.2@26.416,51.308 25.146,52.578 22.86,52.578
  4-BOTTOM w0.635: v1(12.7,39.878) 11.43,41.148 11.43,46.228 12.026,46.824 Cd8.2 ; Cd5.2 38.354,30.988 39.37,29.972 44.196,29.972 44.196,30.734 46.556,33.094 ACT_RpuU1tx.2 ; Cd1.2 39.624,43.522 v1@39.624,46.228
  4-BOTTOM w1.27: P1.1 15.24,55.372 RupWActMSB.2@16.51,54.102 ; Cd2.2@31.75,27.178 31.75,23.622 36.322,19.05 49.276,19.05 51.333,21.107 v1(53.365,21.107) ; 41.313,19.393 41.313,23.353 RpuBP.1 ; 55.143,45.226 Ureg_2V8.3
  other v1: 42.951,16.535 58.445,16.535 17.043,16.789 29.489,16.789 19.583,30.505 55.143,45.745 39.649,46.507 34.29,50.038
5V: "Alim 5V.2" "Electrovannes 5V.1" ACT_CdCan1.2 ACT_CdCan2.2 ACT_Ucan.3 Cd5V.2 Cd.2 Dz5V1.2 Ureg_2V8.1 | length 109.1
  1-TOP w1.27: v1@13.081,37.211 14.732,35.56 47.498,35.56 50.292,38.354 Cd5V.2 60.198,38.862 ; 58.674,50.038 60.198,48.514 60.198,38.862 ; 66.802,34.346 61.793,34.346 60.198,35.941 60.198,38.862
  4-BOTTOM w0.635: ACT_CdCan1.2@2.286,36.83 6.096,36.83 ; ACT_CdCan2.2 ACT_CdCan2.2@6.477,41.656 ; ACT_CdCan2.2@6.35,41.91 6.477,41.783 ACT_CdCan2.2@6.477,41.656 ; v1@12.827,37.338 12.319,36.83 6.096,36.83 ; 6.096,36.83 6.477,37.211 ACT_Ucan.3 ACT_CdCan2.2@6.477,41.656
  4-BOTTOM w1.27: Cd5V.2 52.07,38.862 52.324,39.116 56.134,39.116 57.15,40.132 57.404,39.878 Dz5V1.2@57.404,37.846 ; Dz5V1.2 57.436,36.036 58.928,34.544 67.056,34.544
  other v1: 12.954,37.338
5V_PERM: ACT_UART1.1 ACT_UART1.2 | length 2.8
  4-BOTTOM w0.635: ACT_UART1.1 48.768,30.988 ACT_UART1.2@50.038,29.718
24V: 24V.2 D24.1 Drl0_P+EV1.3 Drl0_P+EV2.3 Drl0_P+EV3.3 Drl0_P+EV4.3 P_EV_0_P+EV1.2 P_EV_0_P+EV2.2 P_EV_0_P+EV3.2 P_EV_0_P+EV4.2 | length 90.5
  2-SIGNAL w1.27: P_EV_0_P+EV4.2@15.494,5.08 15.494,4.064 17.475,2.083 42.799,2.083 ; 29.398,2.083 P_EV_0_P+EV3.2@29.398,4.826 ; P_EV_0_P+EV2.2@43.129,5.08 43.129,2.083 53.899,2.083 P_EV_0_P+EV1.2@56.718,4.902 ; P_EV_0_P+EV1.2@56.642,5.08 56.642,6.096 64.262,13.716 ; 24V.2@61.976,28.194 61.976,26.416 66.802,21.59 66.802,16.256 64.262,13.716 ; v1@66.548,11.684 66.294,11.684 64.262,13.716
  4-BOTTOM w0.635: P_EV_0_P+EV4.2@15.418,4.902 Drl0_P+EV4.3 ; P_EV_0_P+EV3.2@29.144,5.146 Drl0_P+EV3.3 ; P_EV_0_P+EV2.2@42.799,5.207 Drl0_P+EV2.3
  4-BOTTOM w0.762: P_EV_0_P+EV1.2@56.718,4.902 Drl0_P+EV1.3
  other v1: 66.573,11.709
CANH: ACT_Ucan.7 CANin.3 CANout.3 RcanH2.1 | length 34.1
  1-TOP w0.635: v1(6.604,26.162) 6.731,26.289 CANout.3 6.731,34.163 7.747,35.179 7.747,39.243 13.843,45.339 CANin.3
  4-BOTTOM w0.635: ACT_Ucan.7 5.207,30.48 RcanH2.1@6.223,29.464 ; RcanH2.1 6.276,26.49 v1(6.604,26.162)
CANL: ACT_Ucan.6 CANin.2 CANout.2 RcanL2.1 | length 28
  1-TOP w0.635: CANout.2@8.001,30.099 8.001,32.385 8.89,33.274 8.89,38.354 14.605,44.069 CANin.2
  4-BOTTOM w0.635: ACT_Ucan.6 6.477,32.639 8.128,30.988 v1(8.128,26.924) RcanL2.1@8.128,26.416
CAPTRST: Capt0.5 STM32.64 | length 31.2
  4-BOTTOM w0.305: Capt0.5@2.794,16.51 4.318,16.51 10.414,22.606 10.414,33.02 16.593,39.199 STM32.64
EV1: EV0_P+EV1.1 Rdev0_P+EV1.2 RpdEV0_P+EV1.2 STM32.41 | length 40.7
  4-BOTTOM w0.305: STM32.41 24.537,29.057 35.814,17.78 50.546,17.78 51.054,17.272 Rdev0_P+EV1.2@51.054,14.986
  4-BOTTOM w0.635: Rdev0_P+EV1.2 RpdEV0_P+EV1.2 51.001,11.559 EV0_P+EV1.1@51.994,10.566
EV2: EV0_P+EV2.1 Rdev0_P+EV2.2 RpdEV0_P+EV2.2 STM32.42 | length 27.7
  4-BOTTOM w0.305: STM32.42 24.037,26.255 33.02,17.272 35.56,17.272 37.084,15.748 Rdev0_P+EV2.2@37.084,15.24
  4-BOTTOM w0.635: Rdev0_P+EV2.2 RpdEV0_P+EV2.2 37.082,11.635 EV0_P+EV2.1@38.075,10.643
EV3: EV0_P+EV3.1 Rdev0_P+EV3.2 RpdEV0_P+EV3.2 STM32.43 | length 20.9
  4-BOTTOM w0.305: Rdev0_P+EV3.2@23.537,15.155 STM32.43
  4-BOTTOM w0.635: Rdev0_P+EV3.2 RpdEV0_P+EV3.2 23.427,11.6 EV0_P+EV3.1@24.42,10.607
EV4: EV0_P+EV4.1 Rdev0_P+EV4.2 RpdEV0_P+EV4.2 STM32.44 | length 30.7
  4-BOTTOM w0.305: Rdev0_P+EV4.2@9.906,15.24 13.208,18.542 20.828,18.542 23.037,20.751 STM32.44
  4-BOTTOM w0.635: Rdev0_P+EV4.2 RpdEV0_P+EV4.2 9.701,11.608 EV0_P+EV4.1@10.693,10.615
EV5: STM32.45
EV6: STM32.46
EV_GND_P+EV1: Drl0_P+EV1.1 EV0_P+EV1.3 P_EV_0_P+EV1.3 | length 5.9
  4-BOTTOM w0.635: P_EV_0_P+EV1.3@53.01,5.537 EV0_P+EV1.3 ; EV0_P+EV1.3@53.035,7.874 54.64,7.874 Drl0_P+EV1.1
EV_GND_P+EV2: Drl0_P+EV2.1 EV0_P+EV2.3 P_EV_0_P+EV2.3 | length 5.9
  4-BOTTOM w0.635: P_EV_0_P+EV2.3@39.091,5.613 EV0_P+EV2.3 ; EV0_P+EV2.3@39.116,7.95 40.721,7.95 Drl0_P+EV2.1
EV_GND_P+EV3: Drl0_P+EV3.1 EV0_P+EV3.3 P_EV_0_P+EV3.3 | length 5.9
  4-BOTTOM w0.635: P_EV_0_P+EV3.3@25.436,5.578 EV0_P+EV3.3 ; EV0_P+EV3.3@25.461,7.915 27.066,7.915 Drl0_P+EV3.1
EV_GND_P+EV4: Drl0_P+EV4.1 EV0_P+EV4.3 P_EV_0_P+EV4.3 | length 5.9
  4-BOTTOM w0.635: P_EV_0_P+EV4.3@11.709,5.586 EV0_P+EV4.3 ; EV0_P+EV4.3@11.735,7.923 13.34,7.923 Drl0_P+EV4.1
GND: 24V.1 "Alim 5V.1" ACT_CdCan1.1 ACT_CdCan2.1 ACT_Cu1rx.1 ACT_RdwnWAmI.1 ACT_UART1.5 ACT_UART1.6 ACT_Ucan.2 ACT_Ucan.8 BP0.1 C46.1 C47.1 C49.1 C50.1 CANin.1 CANin.4 CANout.1 CANout.4 Capt0.1 Capt0.7 Cd0.1 Cd1.1 Cd2.1 Cd2V8.1 Cd3.1 Cd4.1 Cd5.1 Cd5V.1 Cd6.1 Cd7.1 Cd8.1 Cd9.1 Cd.1 Cf0_P+EV1.1 Cf0_P+EV2.1 Cf0_P+EV3.1 Cf0_P+EV4.1 Cnrst.1 Derr.2 Dev0_P+EV1.2 Dev0_P+EV2.2 Dev0_P+EV3.2 Dev0_P+EV4.2 Dp0_P+EV1.2 Dp0_P+EV2.2 Dp0_P+EV3.2 Dp0_P+EV4.2 Drun.2 DSp0_P+EV1.1 DSp0_P+EV2.1 DSp0_P+EV3.1 DSp0_P+EV4.1 Dst.2 Dz5V1.1 EV0_P+EV1.2 EV0_P+EV2.2 EV0_P+EV3.2 EV0_P+EV4.2 P1.3 RcanH2.2 RcanL2.2 Rd24.2 RdnWActLSB.1 RdnWActMSB.1 RfBP.1 RpdEV0_P+EV1.1 RpdEV0_P+EV2.1 RpdEV0_P+EV3.1 RpdEV0_P+EV4.1 RpdP0_P+EV1.1 RpdP0_P+EV2.1 RpdP0_P+EV3.1 RpdP0_P+EV4.1 Rshunt0_P+EV1.1 Rshunt0_P+EV2.1 Rshunt0_P+EV3.1 Rshunt0_P+EV4.1 STM32.10 STM32.20 STM32.27 STM32.39 STM32.74 STM32.94 STM32.99 Ureg_2V8.2 Ureg_2V8.4 V1.1 V2.1 V3.1 V4.1 | length 128.6
  1-TOP w0.635: Dev0_P+EV4.2 13.521,12.359 ; Dp0_P+EV4.2@13.614,12.215 13.614,11.656 15.963,9.308 Cf0_P+EV4.1 ; Dev0_P+EV3.2 27.248,12.351 ; Dp0_P+EV3.2@27.341,12.207 27.341,11.648 29.689,9.3 Cf0_P+EV3.1 ; Dev0_P+EV2.2 40.903,12.387 ; Dp0_P+EV2.2@40.996,12.243 40.996,11.684 43.344,9.335 Cf0_P+EV2.1 ; Dev0_P+EV1.2 54.822,12.31 ; Dp0_P+EV1.2@54.915,12.167 54.915,11.608 57.263,9.259 Cf0_P+EV1.1
  4-BOTTOM w0.305: Cd8.1@13.97,44.958 16.256,44.958 17.015,44.199 STM32.74 ; STM32.94 29.037,47.579 29.718,48.26 29.718,48.768 29.972,49.022 29.972,49.276 Cd4.1@31.75,51.054 ; STM32.99 31.537,47.285 32.004,47.752 Cd9.1@32.004,48.768 ; Cd9.1@32.004,49.276 Cd4.1@32.004,51.054 ; STM32.20 35.961,35.199 36.322,35.56 36.322,34.29 Cd5.1@38.354,34.29 ; STM32.10 Cd1.1@38.033,40.199
  4-BOTTOM w0.635: ACT_CdCan1.1@2.032,35.218 2.12,35.218 3.556,33.782 ACT_Ucan.8@3.81,33.782 ; ACT_CdCan2.1@4.826,41.402 4.826,40.386 5.207,40.005 ACT_Ucan.2 ; EV0_P+EV4.2 RpdEV0_P+EV4.1@12.659,12.916 ; 13.208,45.212 Cd8.1@13.97,45.212 ; C50.1@13.97,43.434 13.97,44.958 Cd8.1 ; P1.3 20.32,54.61 19.812,54.102 RdnWActLSB.1@21.336,54.102 ; EV0_P+EV3.2 RpdEV0_P+EV3.1@26.386,12.908 ; v1@30.734,51.816 31.496,51.054 31.75,51.054 32.004,51.054 Cd4.1 ; EV0_P+EV2.2 RpdEV0_P+EV2.1@40.041,12.944 ; EV0_P+EV1.2 RpdEV0_P+EV1.1@53.96,12.868 ; Dz5V1.1 66.548,37.338
  4-BOTTOM w1.27: ACT_RdwnWAmI.1@39.878,53.721 39.878,48.006 40.056,47.828 40.196,47.828 40.273,47.752 46.736,47.752 50.292,44.196 Cd5V.1 ; 45.466,40.386 46.736,40.386 Cd5V.1 ; Cd.1 Cd2V8.1@54.61,42.926 ; Ureg_2V8.4@62.738,42.926 Ureg_2V8.2 Cd2V8.1@54.61,42.926 ; 63.098,37.74 Ureg_2V8.4 ; Cd5V.1 51.308,42.926 Cd2V8.1@54.61,42.926
  other v1: 54.204,12.217 12.903,12.266 26.629,12.258 40.284,12.294 60.223,14.249 35.306,16.002 45.72,16.256 19.837,16.535 48.539,16.535 62.763,16.535 27.178,18.542 32.004,20.066 13.97,28.702 38.379,40.665 13.97,41.402 47.752,41.402 4.826,43.434 9.144,44.196 18.923,46.609 13.843,51.435 30.759,51.587
LED_CAN: STM32.60
LED_ERROR: Rderr.1 STM32.57 | length 17.5
  1-TOP w0.635: v1@13.97,26.924 15.494,28.448 Rderr.1
  4-BOTTOM w0.305: v1(13.716,26.924) 12.954,27.686 12.954,32.004 16.649,35.699 STM32.57
LED_RUN: Rdrun.1 STM32.59 | length 24.9
  1-TOP w0.635: v1(12.7,22.86) Rdrun.1
  4-BOTTOM w0.305: v1@12.827,22.733 11.176,24.384 11.176,32.004 15.871,36.699 STM32.59
LED_SELFTEST: Rdst.1 STM32.58 | length 20.7
  1-TOP w0.635: v1(12.446,25.654) Rdst.1
  4-BOTTOM w0.305: v1@12.7,25.654 11.938,26.416 11.938,31.75 16.387,36.199 STM32.58
NetACT_RpuU1tx_1: ACT_RpuU1tx.1 ACT_RsU1tx.1 ACT_UART1.3 | length 4.3
  4-BOTTOM w0.635: ACT_RpuU1tx.1 50.8,35.052 51.308,34.544 ACT_UART1.3@51.308,32.258
NetACT_Rsu1rx_2: ACT_Rsu1rx.2 ACT_UART1.4 | length 3.5
  4-BOTTOM w0.635: ACT_UART1.4 52.578,27.432 ACT_Rsu1rx.2@53.594,26.416
NetC46_2: C46.2 STM32.12 Y1.2 | length 12.6
  4-BOTTOM w0.305: STM32.12 39.707,39.199 Y1.2@41.656,41.148
  4-BOTTOM w1.016: Y1.2 45.034,43.358 C46.2@45.466,42.926
NetC47_2: C47.2 STM32.13 Y1.1 | length 15.4
  4-BOTTOM w0.305: STM32.13 38.771,38.699 Y1.1@41.402,36.068
  4-BOTTOM w1.016: Y1.1 41.91,36.322 43.18,37.592 ; 43.268,37.504 C47.2
NetC49_2: C49.2 STM32.49 | length 4.4
  4-BOTTOM w0.305: C49.2@17.78,28.956 19.558,28.956 20.537,29.935 STM32.49
NetC50_2: C50.2 STM32.73 | length 3.2
  4-BOTTOM w0.305: C50.2@15.494,43.18 16.013,43.699 STM32.73
NetD24_2: D24.2 Rd24.1 | length 2.6
  1-TOP w1.27: D24.2 68.614,14.004 Rd24.1@68.834,14.224
NetDerr_1: Derr.1 Rderr.2 | length 2.1
  1-TOP w1.27: Rderr.2@21.209,28.448 Derr.1
NetDev0_P+EV1_1: Dev0_P+EV1.1 Rdev0_P+EV1.1
  other v1: 53.645,15.062
NetDev0_P+EV2_1: Dev0_P+EV2.1 Rdev0_P+EV2.1
  other v1: 39.726,15.138
NetDev0_P+EV3_1: Dev0_P+EV3.1 Rdev0_P+EV3.1
  other v1: 26.071,15.103
NetDev0_P+EV4_1: Dev0_P+EV4.1 Rdev0_P+EV4.1
  other v1: 12.344,15.111
NetDp0_P+EV1_1: Dp0_P+EV1.1 Rd0_P+EV1.1
  other v1: 55.956,14.732
NetDp0_P+EV2_1: Dp0_P+EV2.1 Rd0_P+EV2.1
  other v1: 42.037,14.808
NetDp0_P+EV3_1: Dp0_P+EV3.1 Rd0_P+EV3.1
  other v1: 28.382,14.773
NetDp0_P+EV4_1: Dp0_P+EV4.1 Rd0_P+EV4.1
  other v1: 14.656,14.781
NetDrun_1: Drun.1 Rdrun.2 | length 2
  1-TOP w1.27: Rdrun.2@21.336,22.86 Drun.1
NetDst_1: Dst.1 Rdst.2 | length 2.1
  1-TOP w1.27: Rdst.2@21.209,25.654 Dst.1
NetPump0_P+EV1_2: Pump0_P+EV1.2 Rs0_P+EV1.1 Rshunt0_P+EV1.2 | length 2.5
  4-BOTTOM w0.635: Pump0_P+EV1.2 Rshunt0_P+EV1.2@61.504,12.126
  other v1: 62.281,9.296
NetPump0_P+EV2_2: Pump0_P+EV2.2 Rs0_P+EV2.1 Rshunt0_P+EV2.2 | length 5.4
  1-TOP w0.635: Rs0_P+EV2.1 47.83,9.32 v1(48.514,8.636)
  4-BOTTOM w0.635: Rshunt0_P+EV2.2@47.584,12.202 Pump0_P+EV2.2 48.514,8.783 v1(48.514,8.636)
NetPump0_P+EV3_2: Pump0_P+EV3.2 Rs0_P+EV3.1 Rshunt0_P+EV3.2
  other v1: 34.29,8.636
NetPump0_P+EV4_2: Pump0_P+EV4.2 Rs0_P+EV4.1 Rshunt0_P+EV4.2 | length 2.5
  4-BOTTOM w0.635: Pump0_P+EV4.2 Rshunt0_P+EV4.2@20.203,12.175
  other v1: 20.574,8.89
PA0_BUTTON: BP0.3 RfBP.2 RpuBP.2 STM32.23 | length 15.5
  4-BOTTOM w0.305: STM32.23 32.175,33.699 32.175,32.595 36.83,27.94 BP0.3@38.426,27.94
  4-BOTTOM w0.635: RpuBP.2@38.354,23.876 39.624,25.146 39.624,26.488 BP0.3
PB6_U1TX: ACT_RsU1tx.2 STM32.92 | length 37.2
  2-SIGNAL w0.508: v1(27.686,48.514) 27.686,50.038 28.194,50.546 32.004,50.546 47.752,34.798 v1@54.102,34.798
  4-BOTTOM w0.305: v1@27.432,48.514 28.037,47.909 STM32.92
  other v1: 54.127,34.823
PB7_U1RX: ACT_Cu1rx.2 ACT_RpuU1rx.1 ACT_Rsu1rx.1 STM32.93 | length 40.2
  2-SIGNAL w0.508: v1@28.956,49.022 v1(28.956,49.276) 31.496,49.276 46.736,34.036 46.736,30.48 v1@47.498,29.718
  4-BOTTOM w0.305: STM32.93 28.537,48.095 28.702,48.26 v1@28.702,49.276
  4-BOTTOM w0.635: v1(47.244,29.718) 47.244,28.448 49.276,26.416 ACT_Rsu1rx.1 50.874,24.458 ACT_Cu1rx.2@50.546,24.13
PB8_I_AM_READY(UNUSED): STM32.95
PB10_I2C_SCL: Capt0.4 STM32.47 | length 38.9
  2-SIGNAL w0.508: Capt0.4@3.048,19.05 10.16,26.162 10.16,28.448 16.51,34.798 20.828,34.798 v1@21.971,33.655
  4-BOTTOM w0.305: 19.558,22.86 21.537,24.839 STM32.47 21.537,33.221 v1@21.844,33.528
  other v1: 22.098,33.528
PB11_I2C_SDA: Capt0.6 STM32.48 | length 31.8
  2-SIGNAL w0.508: Capt0.6@2.794,13.97 2.794,14.224 11.176,22.606 11.176,28.448 16.51,33.782 20.066,33.782 v1(20.574,33.274)
  4-BOTTOM w0.305: v1@20.574,33.02 21.037,32.557 STM32.48
PC6_VLED: STM32.63
PC13_WHO_AM_I: ACT_RdwnWAmI.2 ACT_RupWAmI.1 STM32.7 | length 16.3
  4-BOTTOM w0.305: STM32.7 32.301,41.699 32.004,41.997 32.004,44.704 35.306,48.006 35.306,49.022 ; ACT_RupWAmI.1 ACT_RdwnWAmI.2@36.576,53.594
  4-BOTTOM w0.508: 35.306,49.022 ACT_RupWAmI.1@35.306,53.594
PD0_CANRX: ACT_Ucan.4 STM32.81 | length 22.6
  4-BOTTOM w0.305: ACT_Ucan.4@7.874,39.878 10.668,42.672 10.668,46.736 12.954,49.022 20.828,49.022 22.537,47.313 STM32.81
PD1_CANTX: ACT_Ucan.1 STM32.82 | length 28.9
  4-BOTTOM w0.305: ACT_Ucan.1@3.81,39.624 2.54,40.894 2.54,42.418 9.652,49.53 21.082,49.53 23.037,47.575 STM32.82
PD5_MAX485_SENS: STM32.86
PD6_ACT_AM_I_MSB: RdnWActMSB.2 RupWActMSB.1 STM32.87 | length 11.2
  4-BOTTOM w0.305: RdnWActMSB.2 19.304,50.8 20.066,50.038 23.114,50.038 25.537,47.615 STM32.87
  4-BOTTOM w0.635: RupWActMSB.1 RdnWActMSB.2@18.976,51.128
PD7_ACT_AM_I_LSB: RdnWActLSB.2 RupWActLSB.1 STM32.88 | length 7.6
  4-BOTTOM w0.305: RdnWActLSB.2 RupWActLSB.1@23.802,51.128 ; RupWActLSB.1@24.13,50.8 24.13,50.038 26.037,48.131 STM32.88
PD8_MAX485_TX: STM32.55
PD9_MAX485_RX: STM32.56
PROG_NRST: Cnrst.2 P1.5 Rnrst.1 STM32.14 | length 29.1
  2-SIGNAL w0.508: P1.5@25.654,56.642 25.654,49.217 31.183,43.688 31.496,43.688 36.576,38.608 v1@36.576,37.592
  4-BOTTOM w0.305: STM32.14 35.969,38.199 Cnrst.2@36.322,37.846
  4-BOTTOM w0.508: P1.5 25.908,55.88 Rnrst.1@25.908,54.102
  other v1: 36.347,37.617
PROG_SWCLK: P1.2 STM32.76 | length 11.6
  2-SIGNAL w0.508: v1(18.034,48.006) P1.2@18.034,56.134
  4-BOTTOM w0.305: v1@18.161,48.26 19.304,48.26 20.037,47.527 STM32.76
PROG_SWDIO: P1.4 STM32.72 | length 15.1
  2-SIGNAL w0.508: v1(20.574,44.45) 20.574,53.848 P1.4@22.86,56.134
  4-BOTTOM w0.305: STM32.72 19.577,43.199 v1@20.574,44.196
PROG_SWO: P1.6 STM32.89 | length 10.6
  4-BOTTOM w0.305: STM32.89 26.537,49.143 27.94,50.546 27.94,55.88 P1.6@28.194,56.134
PUMP1: Pump0_P+EV1.1 Rd0_P+EV1.2 RpdP0_P+EV1.2 STM32.96 | length 53.5
  2-SIGNAL w0.508: v1(30.734,48.006) 30.734,45.974 45.212,31.496 45.212,29.718 51.054,23.876 51.054,21.59 57.15,15.494 v1(57.15,11.938)
  4-BOTTOM w0.305: STM32.96 30.037,47.309 v1@30.48,47.752
  4-BOTTOM w0.635: Rd0_P+EV1.2@56.388,11.76 56.566,11.582 58.903,11.582 59.604,10.881 Pump0_P+EV1.1
PUMP2: Pump0_P+EV2.1 Rd0_P+EV2.2 RpdP0_P+EV2.2 STM32.51 | length 41
  2-SIGNAL w0.508: v1@17.526,31.242 17.526,30.48 18.796,29.21 20.574,29.21 36.322,13.462 40.894,13.462 42.418,11.938 v1(43.18,11.938)
  4-BOTTOM w0.305: v1(17.526,31.496) 17.526,32.512 17.713,32.699 STM32.51
  4-BOTTOM w0.635: Rd0_P+EV2.2@42.469,11.836 42.647,11.659 44.983,11.659 45.684,10.958 Pump0_P+EV2.1
PUMP3: Pump0_P+EV3.1 Rd0_P+EV3.2 RpdP0_P+EV3.2 STM32.52 | length 34.8
  2-SIGNAL w0.508: 16.256,30.734 16.256,21.844 24.638,13.462 27.686,13.462 v1@29.337,11.811
  4-BOTTOM w0.305: v1@16.256,30.988 16.256,32.258 17.197,33.199 STM32.52
  4-BOTTOM w0.635: Rd0_P+EV3.2@28.814,11.801 28.992,11.623 31.328,11.623 32.029,10.922 Pump0_P+EV3.1
  other v1: 29.464,11.938 16.256,31.242
PUMP4: Pump0_P+EV4.1 Rd0_P+EV4.2 RpdP0_P+EV4.2 STM32.53 | length 29.6
  2-SIGNAL w0.508: v1(14.986,30.734) 14.986,16.256 16.002,15.24 v1@16.002,11.684
  4-BOTTOM w0.305: v1(14.986,30.734) 14.986,31.75 16.935,33.699 STM32.53
  4-BOTTOM w0.635: Rd0_P+EV4.2@15.088,11.809 15.265,11.631 17.602,11.631 18.303,10.93 Pump0_P+EV4.1
  other v1: 15.748,11.938
PUMP5: STM32.54
PUMP6: STM32.66
PUMP_GND_P+EV1: Drl0_P+EV1.2 P_EV_0_P+EV1.1 Pump0_P+EV1.3 | length 6.2
  4-BOTTOM w0.635: Drl0_P+EV1.2 57.668,8.626 58.572,7.722 Pump0_P+EV1.3@60.503,7.722 ; P_EV_0_P+EV1.1@60.554,5.156 Pump0_P+EV1.3
PUMP_GND_P+EV2: Drl0_P+EV2.2 P_EV_0_P+EV2.1 Pump0_P+EV2.3 | length 6.2
  4-BOTTOM w0.635: Drl0_P+EV2.2 43.749,8.702 44.653,7.798 Pump0_P+EV2.3@46.584,7.798 ; P_EV_0_P+EV2.1@46.634,5.232 Pump0_P+EV2.3
PUMP_GND_P+EV3: Drl0_P+EV3.2 P_EV_0_P+EV3.1 Pump0_P+EV3.3 | length 6.2
  4-BOTTOM w0.635: Drl0_P+EV3.2 30.094,8.666 30.998,7.762 Pump0_P+EV3.3@32.929,7.762 ; P_EV_0_P+EV3.1@32.979,5.197 Pump0_P+EV3.3
PUMP_GND_P+EV4: Drl0_P+EV4.2 P_EV_0_P+EV4.1 Pump0_P+EV4.3 | length 6.2
  4-BOTTOM w0.635: Drl0_P+EV4.2 16.368,8.674 17.272,7.77 Pump0_P+EV4.3@19.202,7.77 ; P_EV_0_P+EV4.1@19.253,5.205 Pump0_P+EV4.3
SHUNT1: Cf0_P+EV1.2 DSp0_P+EV1.3 Rs0_P+EV1.2 STM32.25 | length 49.3
  1-TOP w0.635: v1(37.592,29.464) 36.83,28.702 36.83,26.67 40.64,22.86 40.64,20.574 41.91,19.304 57.404,19.304 61.722,14.986 61.722,12.065 59.385,12.065 ; DSp0_P+EV1.3 58.496,11.176 59.385,12.065 ; Rs0_P+EV1.2@60.985,12.065 59.385,12.065
  4-BOTTOM w0.305: STM32.25 36.823,29.464 v1(37.592,29.464)
SHUNT2: Cf0_P+EV2.2 DSp0_P+EV2.3 Rs0_P+EV2.2 STM32.26 | length 36.4
  1-TOP w0.635: v1(32.004,28.956) 31.242,28.194 31.242,22.86 36.068,18.034 46.228,18.034 47.498,16.764 Rs0_P+EV2.2@47.498,12.192 ; DSp0_P+EV2.3 44.577,11.252 45.466,12.141 Rs0_P+EV2.2@47.066,12.141
  4-BOTTOM w0.305: v1@32.037,28.956 STM32.26
SHUNT3: Cf0_P+EV3.2 DSp0_P+EV3.3 Rs0_P+EV3.2 STM32.29 | length 25.3
  1-TOP w0.635: v1(29.718,26.416) 29.718,19.558 33.665,15.611 Rs0_P+EV3.2 ; DSp0_P+EV3.3 30.922,11.217 31.811,12.106 Rs0_P+EV3.2@33.411,12.106
  4-BOTTOM w0.305: v1@29.972,26.416 30.537,26.981 STM32.29
SHUNT4: Cf0_P+EV4.2 DSp0_P+EV4.3 Rs0_P+EV4.2 STM32.30 | length 27.4
  1-TOP w0.635: DSp0_P+EV4.3 17.196,11.225 18.085,12.114 Rs0_P+EV4.2@19.685,12.114 ; Rs0_P+EV4.2 19.939,14.351 28.448,22.86 v1@28.448,27.178
  4-BOTTOM w0.305: v1@28.956,27.178 30.037,28.259 STM32.30
  other v1: 28.702,27.178
SHUNT5: STM32.31
SHUNT6: STM32.32
VLED: Capt0.2
pads on no net: ACT_UART1.FIX1 ACT_UART1.FIX2 ACT_Ucan.5 BP0.2 BP0.4 CANin.MH1 CANin.MH2 CANout.MH1 CANout.MH2 STM32.1 STM32.2 STM32.3 STM32.4 STM32.5 STM32.8 STM32.9 STM32.15 STM32.16 STM32.17 STM32.18 STM32.24 STM32.33 STM32.34 STM32.35 STM32.36 STM32.37 STM32.38 STM32.40 STM32.61 STM32.62 STM32.65 STM32.67 STM32.68 STM32.69 STM32.70 STM32.71 STM32.77 STM32.78 STM32.79 STM32.80 STM32.83 STM32.84 STM32.85 STM32.90 STM32.91 STM32.97 STM32.98

## Polygon pours and split planes (outlines as drawn)
GND on 4-BOTTOM "4-BOTTOM-GND" (solid, pour order 8): 72.136,58.039 72.136,0 0.09,0.117 0,58.039
GND on 1-TOP "1-GND" (solid, pour order 7): 71.882,58.039 71.882,0 0.089,0.117 0,58.039
GND on 2-SIGNAL "2-GND" (solid, pour order 6): 72.009,58.166 72.009,0 0.09,0.118 0,58.166
GND on 3-GND "3-GND" (solid, pour order 5): 72.136,58.166 72.136,0 0.09,0.118 0,58.166

## Keep-outs
Keep-Out Layer:
  the board outline again, w1

## Silkscreen, mask and mechanical layers (free items; w line width, h text height)
Top Overlay:
  text "5V" at 57.785,55.118 h1.02
  text "ROBOT ESEO 2018" at 35.687,54.864 h2.03
  text "1" at 15.24,54.61 h1.02 r180
  text "ACT EXPANDER 4 PUMPS" at 35.687,52.832 h2.03
  text "CAN" at 20.066,51.943 h1.02
  text "Nirgal" at 35.687,50.8 h2.03
  text "Si EV en 5V->" at 42.164,50.292 h1.02
  text "CAN" at 11.176,45.593 h1.02
  text "100uF" at 52.832,36.068 h1.02 r180
  text "5V" at 63.246,33.401 h1.02 r90
  text "24V" at 60.198,31.369 h1.02
  text "UART" at 44.45,29.464 h1.02 r90
  text "^" at 20.32,28.702 h1.02 r90
  text "24V" at 64.008,28.575 h1.02 r270
  text "R" at 27.559,27.94 h1.02
  text "-" at 20.32,26.162 h1.02 r90
  text "GND" at 7.112,25.146 h1.02
  text "B" at 27.305,25.019 h1.02
  text "VLED" at 6.35,23.495 h1.02
  text "^" at 20.32,23.241 h1.02 r90
  text "V" at 27.305,22.479 h1.02
  text "GND" at 60.579,21.717 h1.27
  text "2V8" at 6.35,20.955 h1.02
  text "BAT54S" at 19.431,18.923 h1.02 r270
  text "SCL" at 6.35,18.669 h1.02
  text "BAT54S" at 33.147,18.669 h1.02 r270
  text "GND" at 65.786,18.161 h1.27 r90
  text "RST" at 6.35,16.129 h1.02
  text "Y" at 11.303,16.129 h1.02
  text "O" at 13.843,16.129 h1.02
  text "Y" at 25.273,16.129 h1.02
  text "O" at 27.813,16.129 h1.02
  text "Y" at 38.735,16.129 h1.02
  text "O" at 41.275,16.129 h1.02
  text "Y" at 52.705,16.129 h1.02
  text "O" at 55.245,16.129 h1.02
  text "4.7k" at 61.849,13.843 h1.02
  text "SDA" at 6.35,13.589 h1.02
  text "O" at 64.389,11.049 h1.02
  text "GND" at 6.35,10.668 h1.02
  text "+" at 20.447,10.287 h1.02 r90
  text "+" at 34.417,10.287 h1.02 r90
  text "+" at 47.879,10.287 h1.02 r90
  text "+" at 61.849,10.287 h1.02 r90
  text "3" at 10.033,8.509 h3.05
  text "1u" at 16.129,8.509 h1.02 r90
  text "2" at 23.749,8.509 h3.05
  text "1u" at 30.099,8.509 h1.02 r90
  text "1" at 37.465,8.509 h3.05
  text "1u" at 43.561,8.509 h1.02 r90
  text "0" at 51.181,8.509 h3.05
  text "1u" at 57.531,8.509 h1.02 r90
Bottom Overlay:
  lines w0.381: 17.018,6.604 17.018,2.794 17.78,2.032 ; 30.734,6.731 30.734,2.921 31.496,2.159 ; 44.323,6.731 44.323,2.921 45.085,2.159 ; 58.166,6.731 58.166,2.921 58.928,2.159
  text "ACT EXPANDER 4 PUMPS" at 58.547,55.626 h2.03
  text "UP" at 34.163,55.245 h1.02
  text "DOWN" at 40.005,55.245 h1.02
  text "ROBOT ESEO 2018" at 53.975,53.467 h2.03
  text "-" at 17.272,52.07 h1.02
  text "-" at 19.304,52.07 h1.02
  text "-" at 21.844,52.07 h1.02
  text "-" at 24.13,52.07 h1.02
  text "*" at 26.416,52.07 h1.02
  text "°" at 36.322,50.927 h0.76
  text "Nirgal" at 45.339,50.673 h2.03
  text "1n" at 35.306,48.641 h1.02 r270
  text "°" at 14.097,48.514 h0.76
  text "1n" at 16.51,48.133 h1.02
  text "TLV1117LV28DCYR" at 69.215,46.736 h1.02
  text "8MHz" at 46.99,45.72 h1.02
  text "10uF" at 52.451,45.466 h1.02 r90
  text "°" at 38.862,44.069 h0.76
  text "1n" at 36.83,43.815 h1.02
  text "17p" at 47.244,42.418 h1.02 r270
  text "2.2u" at 12.954,41.529 h1.02 r180
  text "10n" at 52.959,41.148 h1.02 r90
  text "1u" at 7.62,41.021 h1.02 r270
  text "17p" at 47.244,38.1 h1.02 r270
  text "°" at 38.862,37.465 h0.76
  text "1M" at 49.53,36.576 h1.02
  text "100" at 54.102,36.576 h1.02
  text "#" at 47.752,35.56 h1.02 r180
  text "1R" at 60.706,35.179 h1.02 r180
  text "MCP2551" at 9.144,33.909 h1.02 r270
  text "°" at 2.54,33.274 h0.76
  text "100" at 11.43,31.877 h1.02 r270
  text "1n" at 35.56,31.115 h1.02 r180
  text "°" at 39.116,30.353 h0.76
  text "+" at 45.974,29.21 h1.02
  text "GND" at 4.826,27.686 h1.02 r90
  text "2.2u" at 15.367,27.305 h1.02 r180
  text "°" at 36.068,27.305 h0.76
  text "-" at 52.832,26.797 h1.02 r90
  text "°" at 38.608,25.527 h0.76
  text "1n" at 35.052,24.511 h1.02 r270
  text "*" at 40.386,22.987 h1.02
  text "VLED" at 7.239,22.733 h1.02
  text "Bouchon" at 10.033,22.733 h1.02 r270
  text "100p" at 50.292,22.733 h1.02 r180
  text "60R si" at 11.303,22.606 h1.02 r270
  text "GND" at 65.532,21.463 h1.27 r90
  text "2V8" at 7.747,21.082 h1.02
  text "SCL" at 7.747,18.796 h1.02
  text "RST" at 7.747,16.256 h1.02
  text "^" at 12.065,15.367 h1.02 r90
  text "^" at 39.243,15.367 h1.02 r90
  text "^" at 53.213,15.367 h1.02 r90
  text "^" at 25.781,15.113 h1.02 r90
  text "SDA" at 7.747,13.716 h1.02
  text "1R" at 21.717,13.589 h1.02
  text "1R" at 48.895,13.589 h1.02
  text "1R" at 62.865,13.589 h1.02
  text "GND" at 60.325,13.437 h1.27 r90
  text "1R" at 35.433,13.335 h1.02
  text "+" at 18.161,13.081 h1.02
  text "+" at 45.339,13.081 h1.02
  text "+" at 59.309,13.081 h1.02
  text "+" at 31.877,12.827 h1.02
  text "^" at 15.621,12.573 h1.02
  text "^" at 42.799,12.573 h1.02
  text "^" at 56.769,12.573 h1.02
  text "^" at 29.337,12.319 h1.02
  text "+" at 11.811,12.065 h1.02
  text "+" at 38.989,12.065 h1.02
  text "+" at 52.959,12.065 h1.02
  text "+" at 25.527,11.811 h1.02
  text "NMOS" at 9.779,11.049 h1.02 r90
  text "GND" at 7.747,10.795 h1.02
  text "NMOS" at 50.927,10.541 h1.02 r90
  text "NMOS" at 23.749,10.287 h1.02 r90
  text "NMOS" at 37.211,10.033 h1.02 r90
  text "NMOS" at 21.463,6.477 h1.02 r270
  text "NMOS" at 48.641,6.477 h1.02 r270
  text "NMOS" at 62.865,6.477 h1.02 r270
  text "NMOS" at 34.925,6.223 h1.02 r270
  text "BAT54C" at 24.257,1.651 h1.02
  text "BAT54C" at 51.435,1.651 h1.02
  text "BAT54C" at 37.973,1.397 h1.02
  text "3" at 15.367,1.143 h3.05
  text "2" at 29.083,1.143 h3.05
  text "1" at 42.799,1.143 h3.05
  text "0" at 56.515,1.143 h3.05
  text "BAT54C" at 64.389,0.635 h1.02

## Text inside footprints (layer, text, board x,y; h text height)
Cd5V: Top Overlay "+" at 49.652,47.822 h1.14 r270